# Altium PCB Kanaloa_v2.0.0_Motor.PcbDoc (part 1 of 3)
Units mil, origin at the board's own origin, x right, y up, seen from the top; angles counter-clockwise.
Board outline 5000 x 6000 mil, 4 copper layers (Top Layer, +24V, GND, Bottom Layer), stack 62 mil thick; 213 components, 187 nets, 1008 pads, 744 vias.
Unrouted connection lines stored in the file: 2.
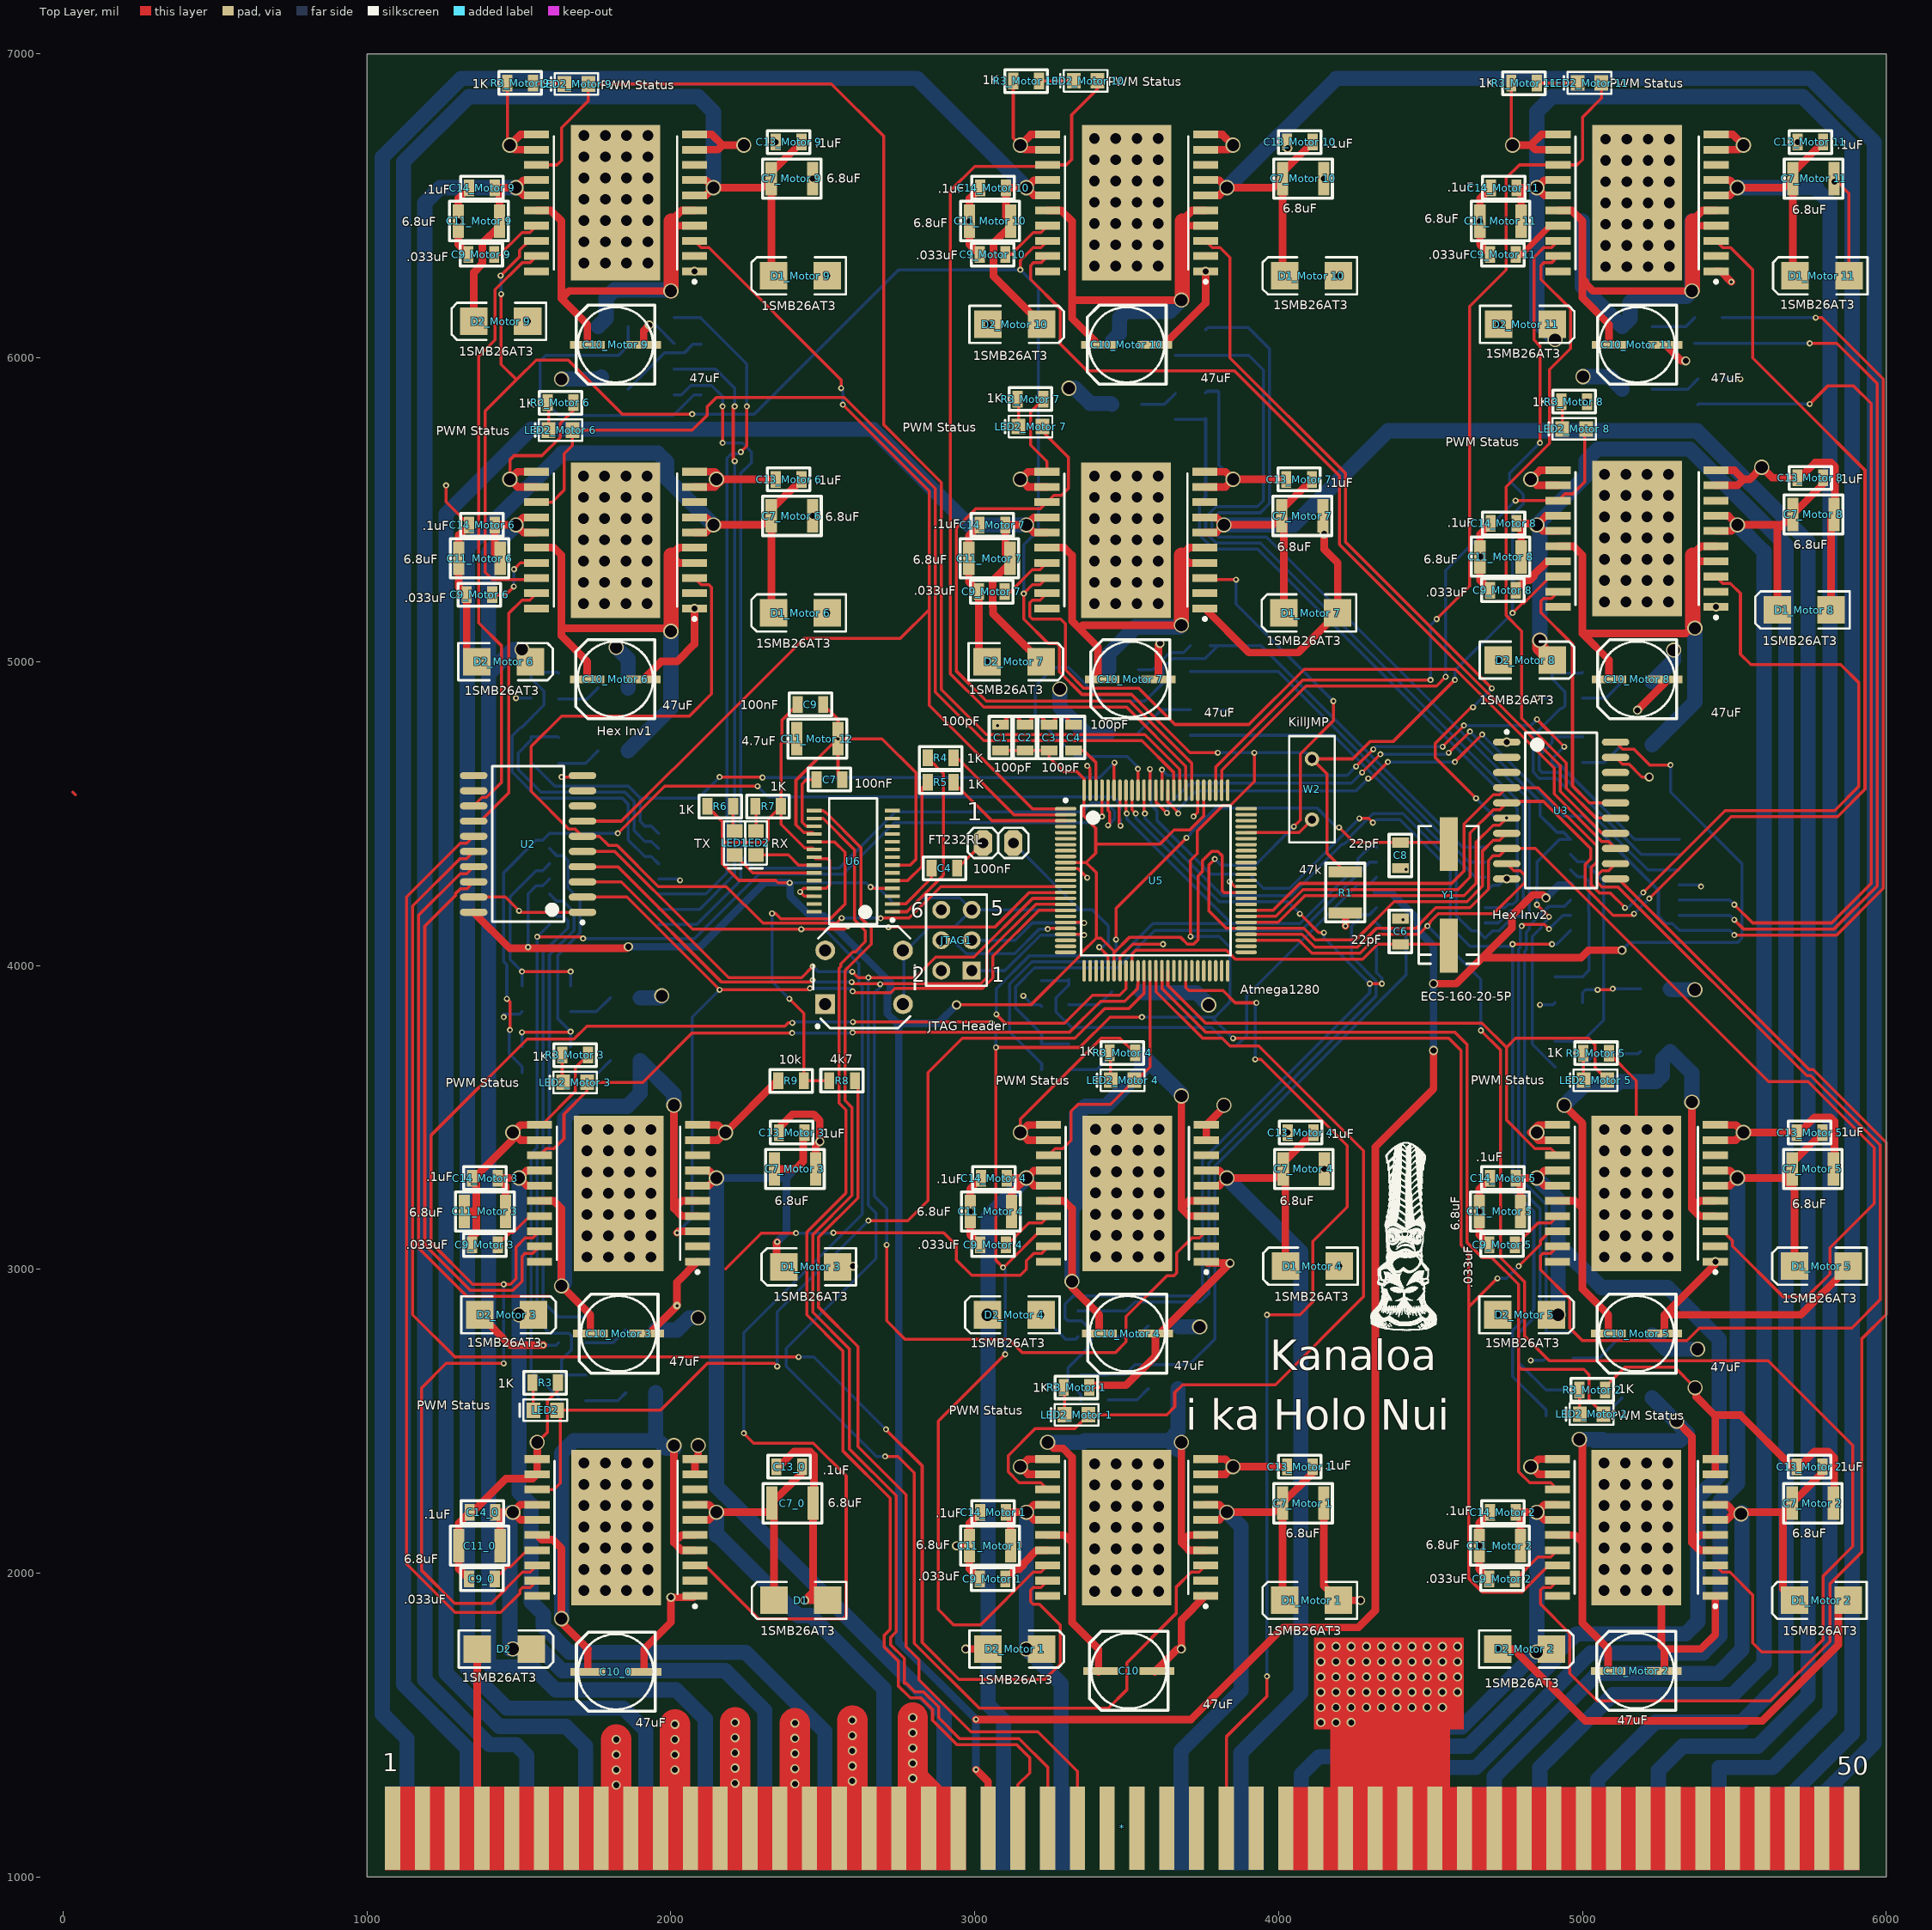
[diagram p0: Top Layer view]
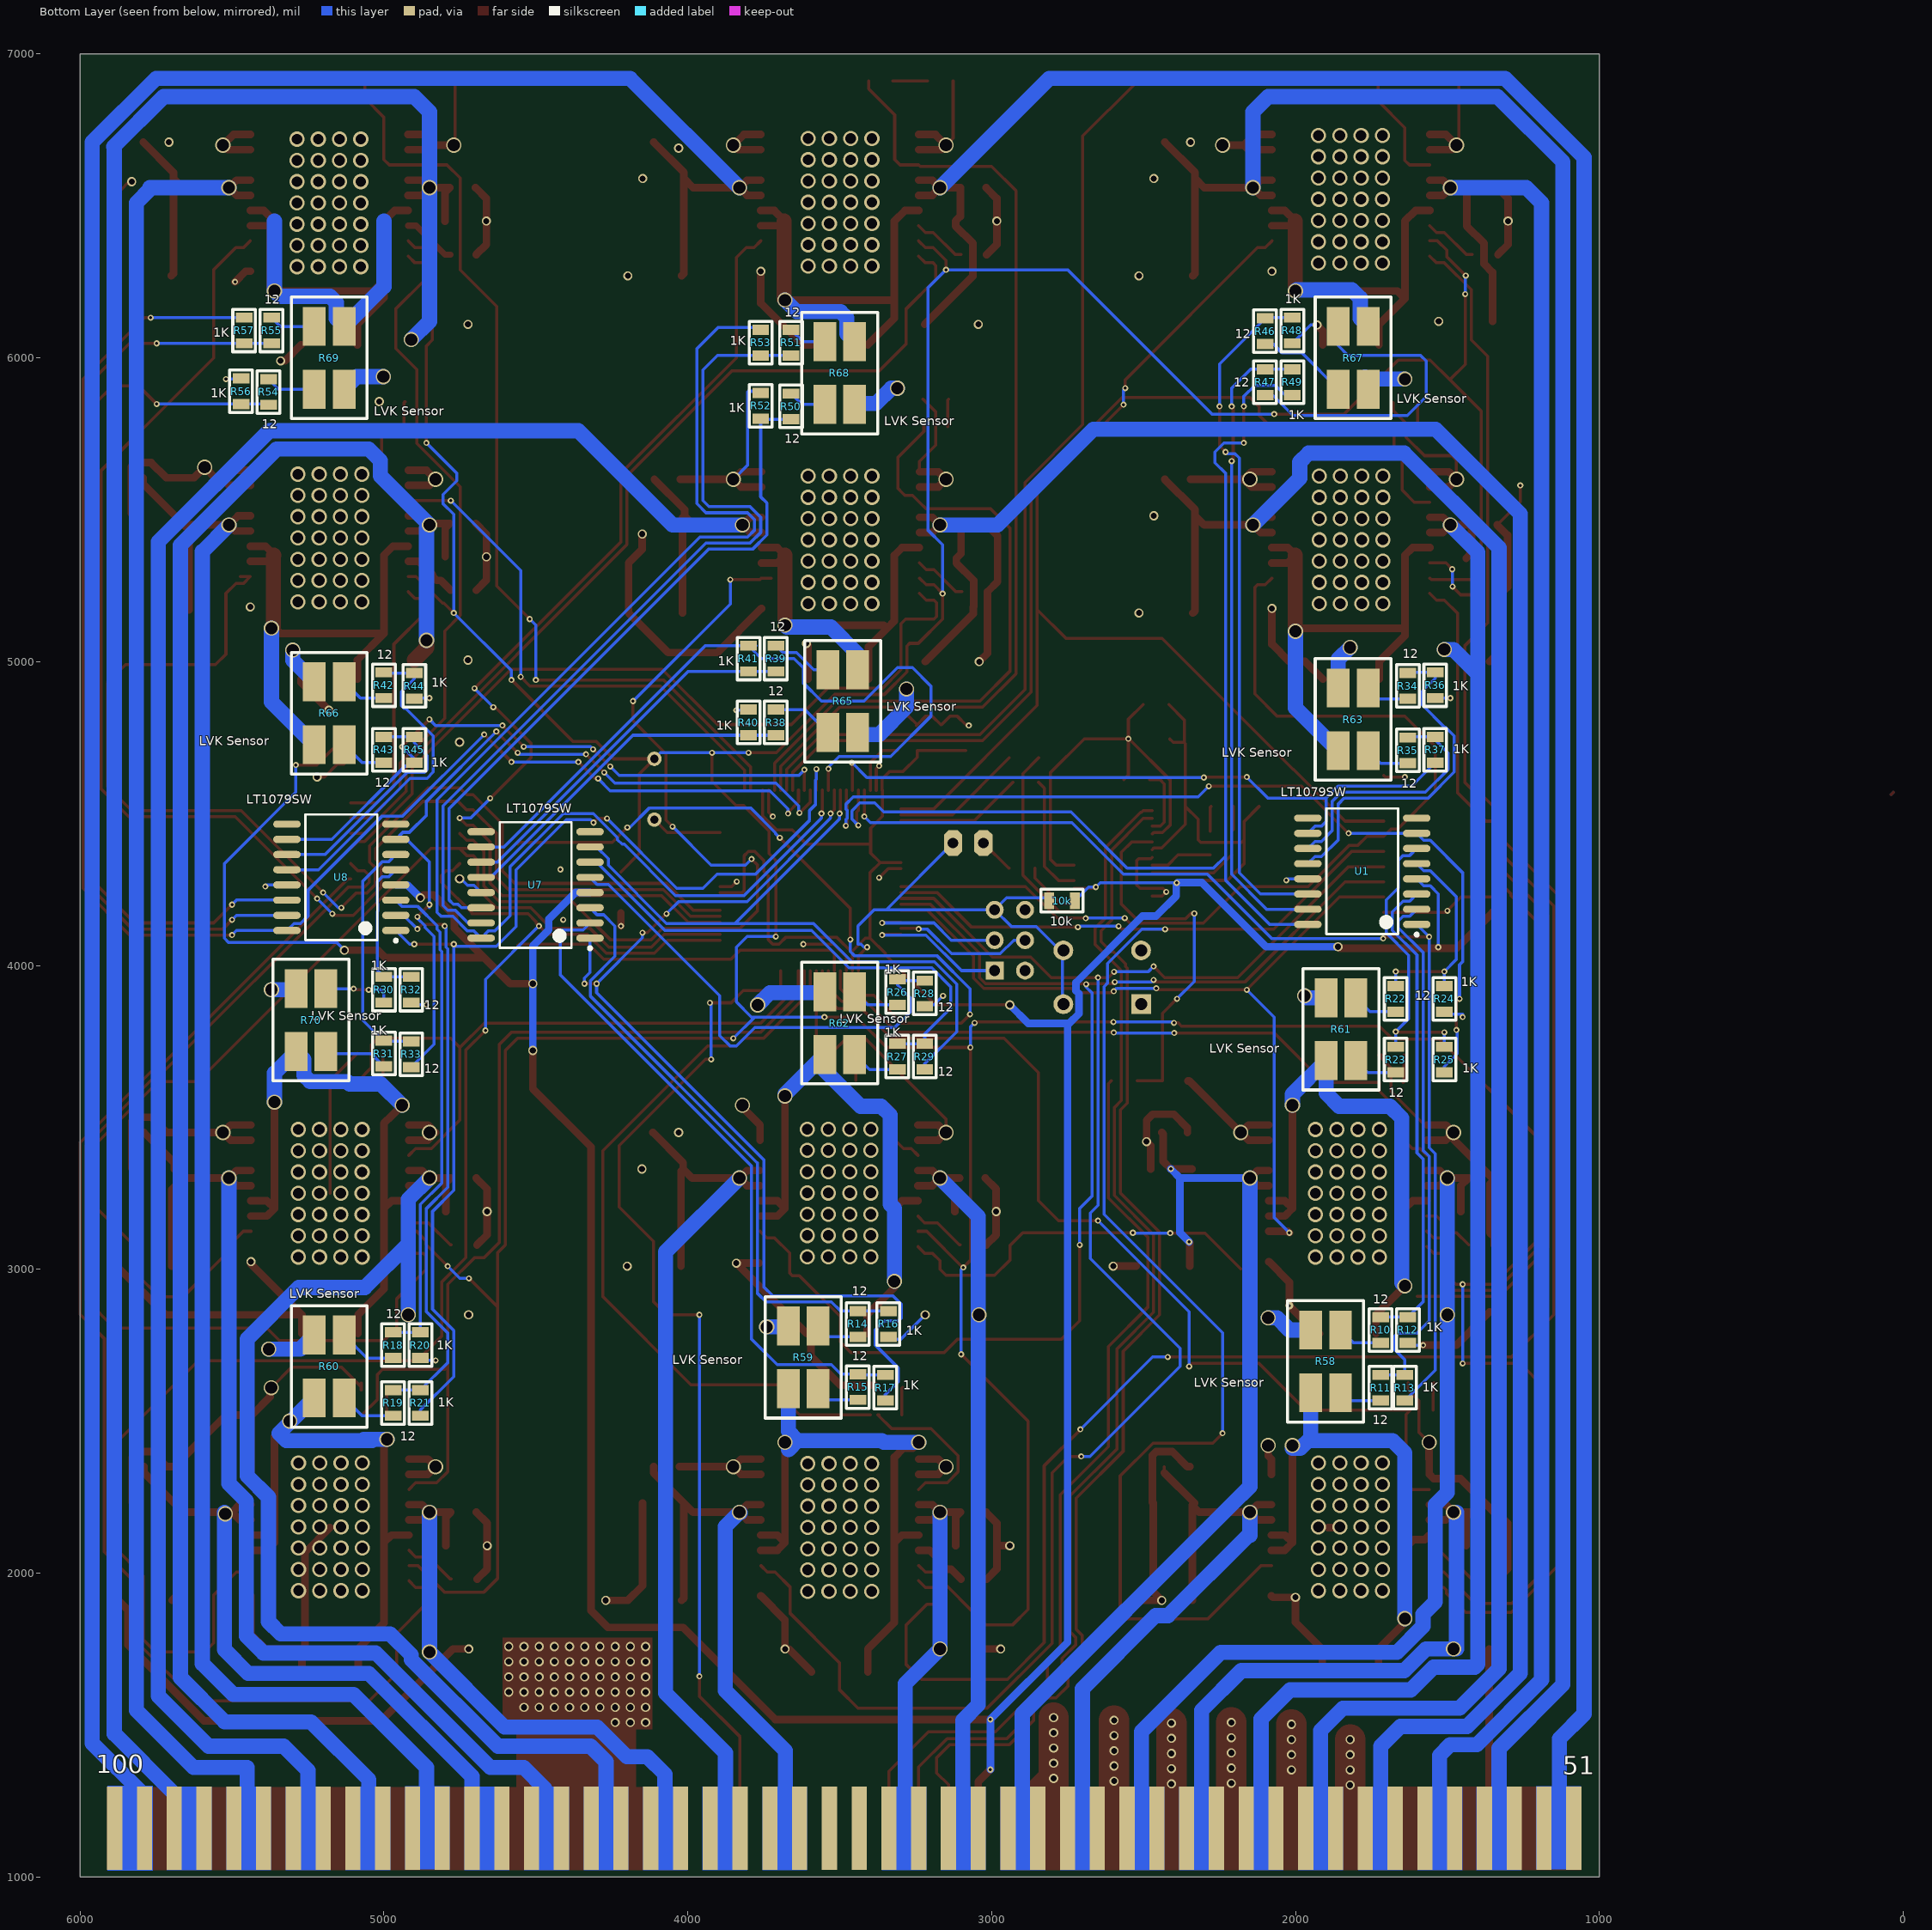
[diagram p1: Bottom Layer view, seen from below]
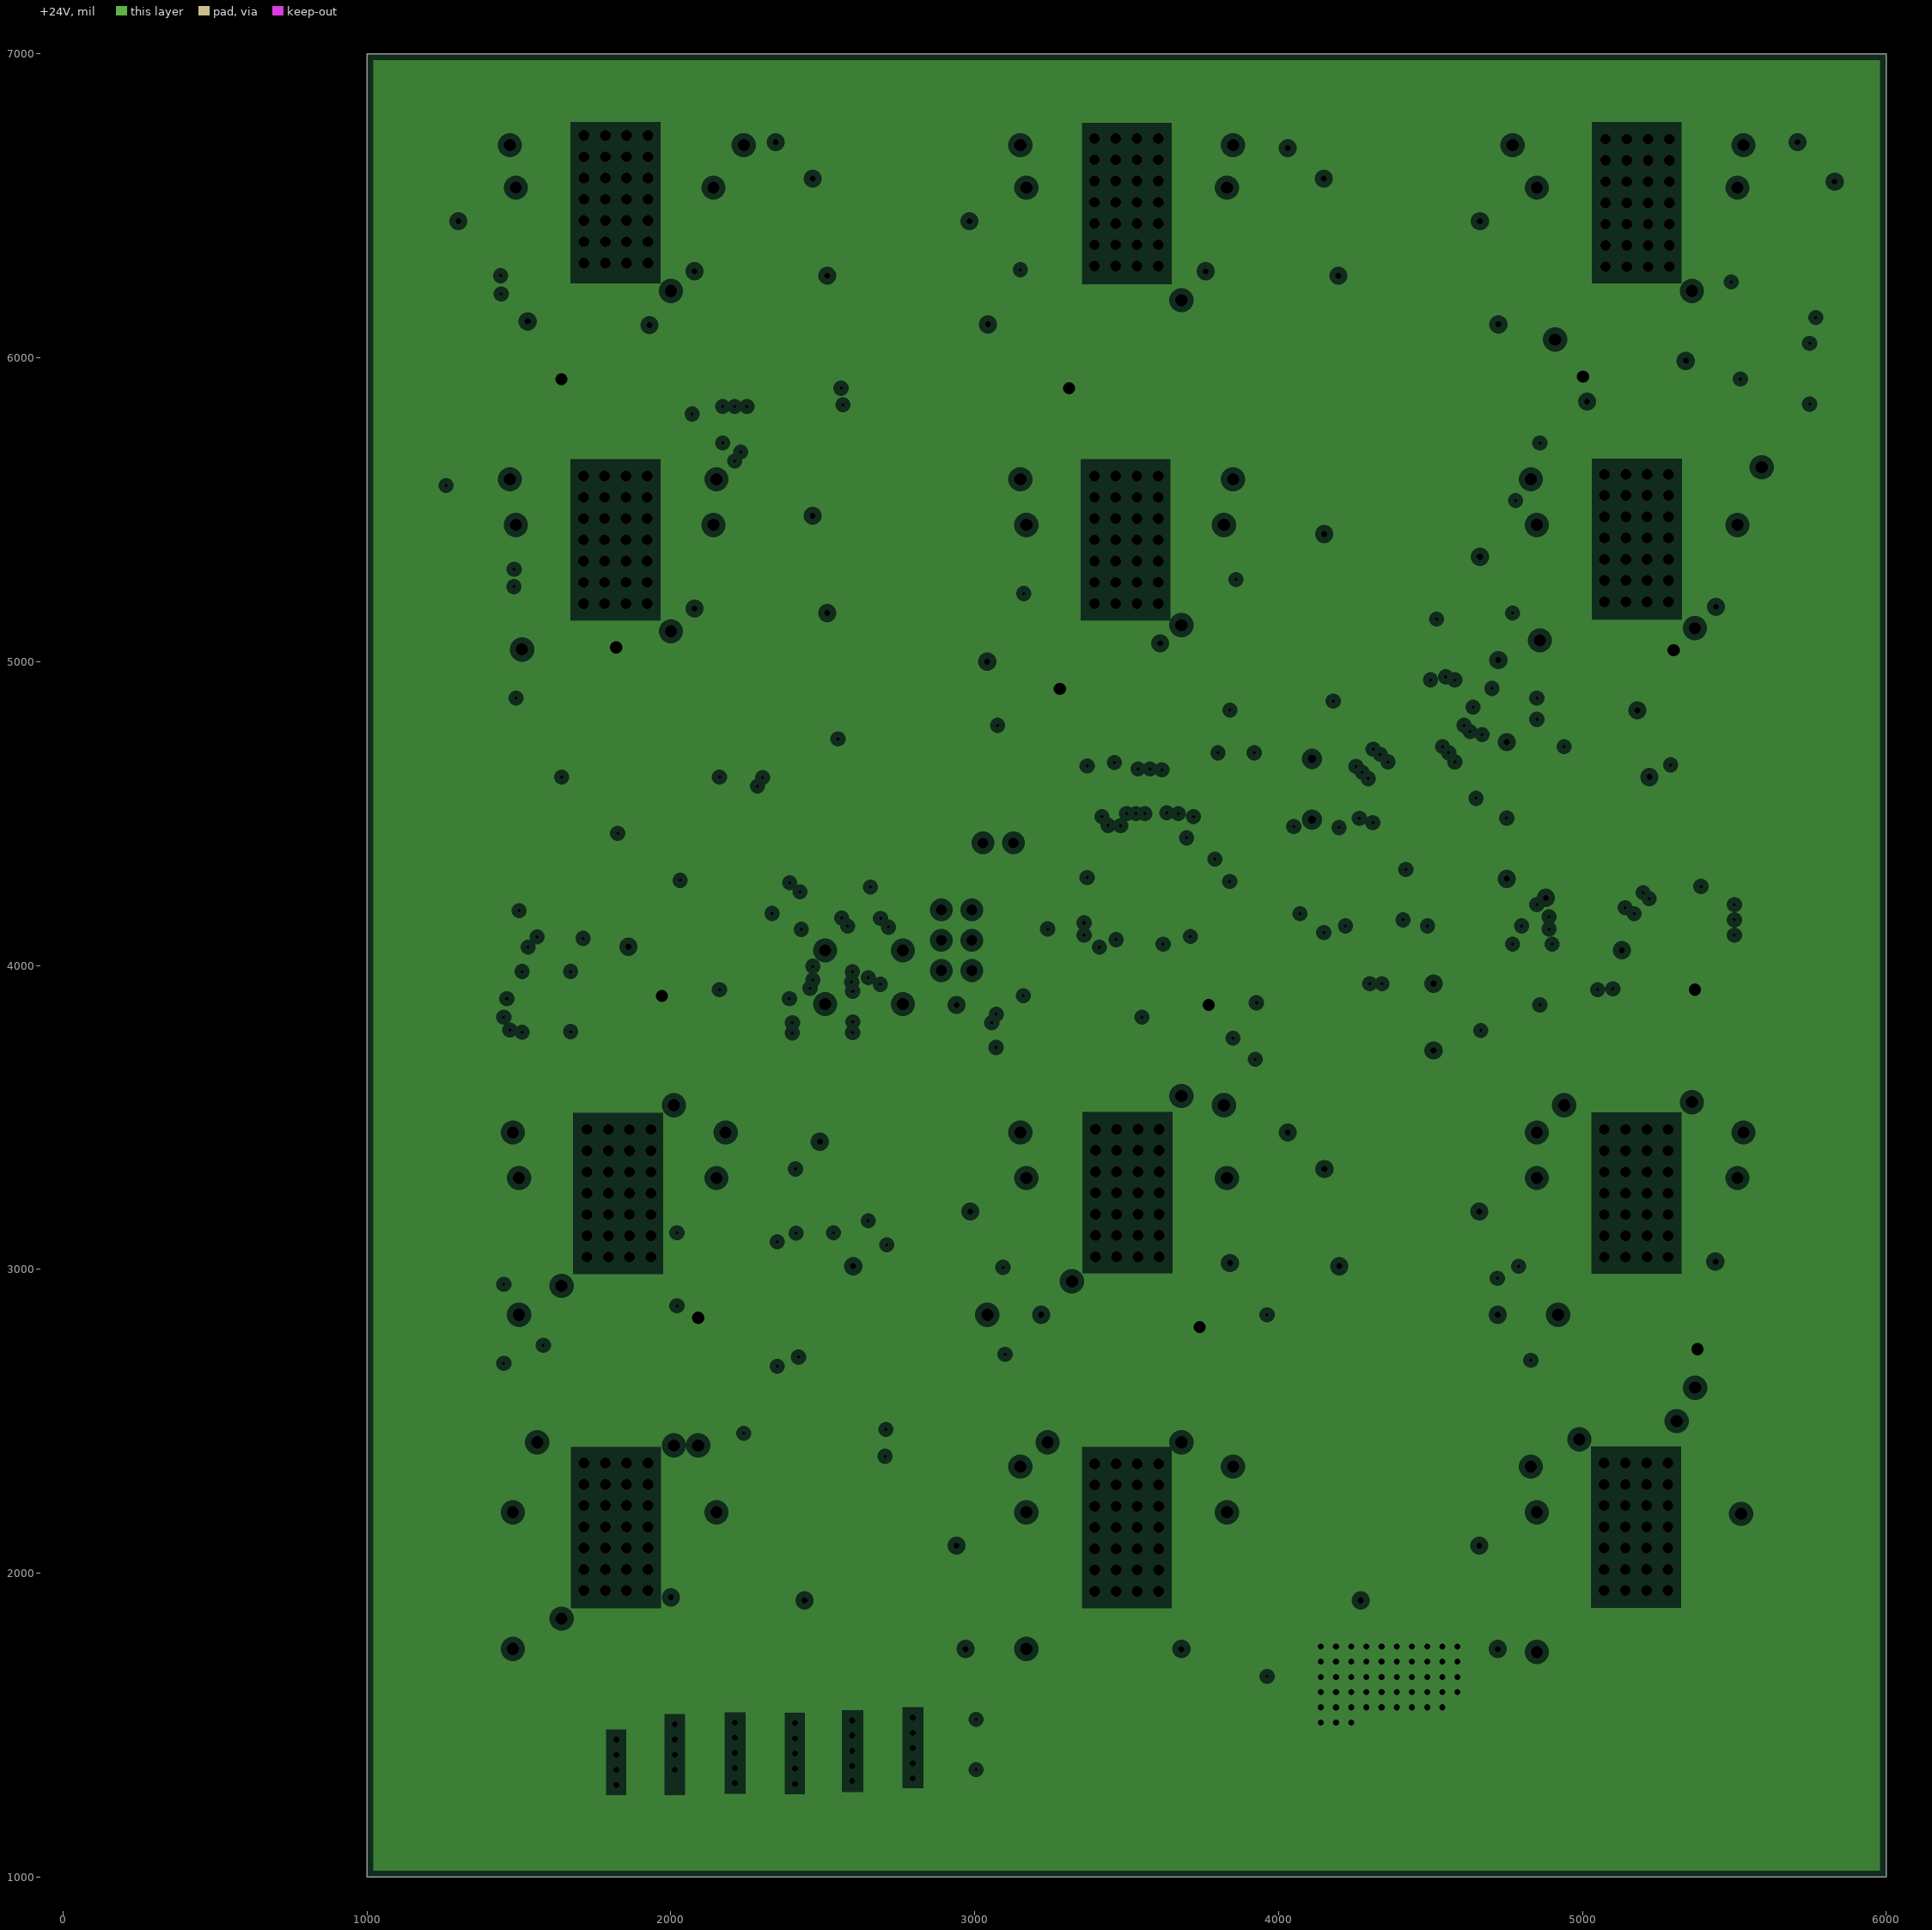
[diagram p2: +24V, clearances drawn from the general rule]
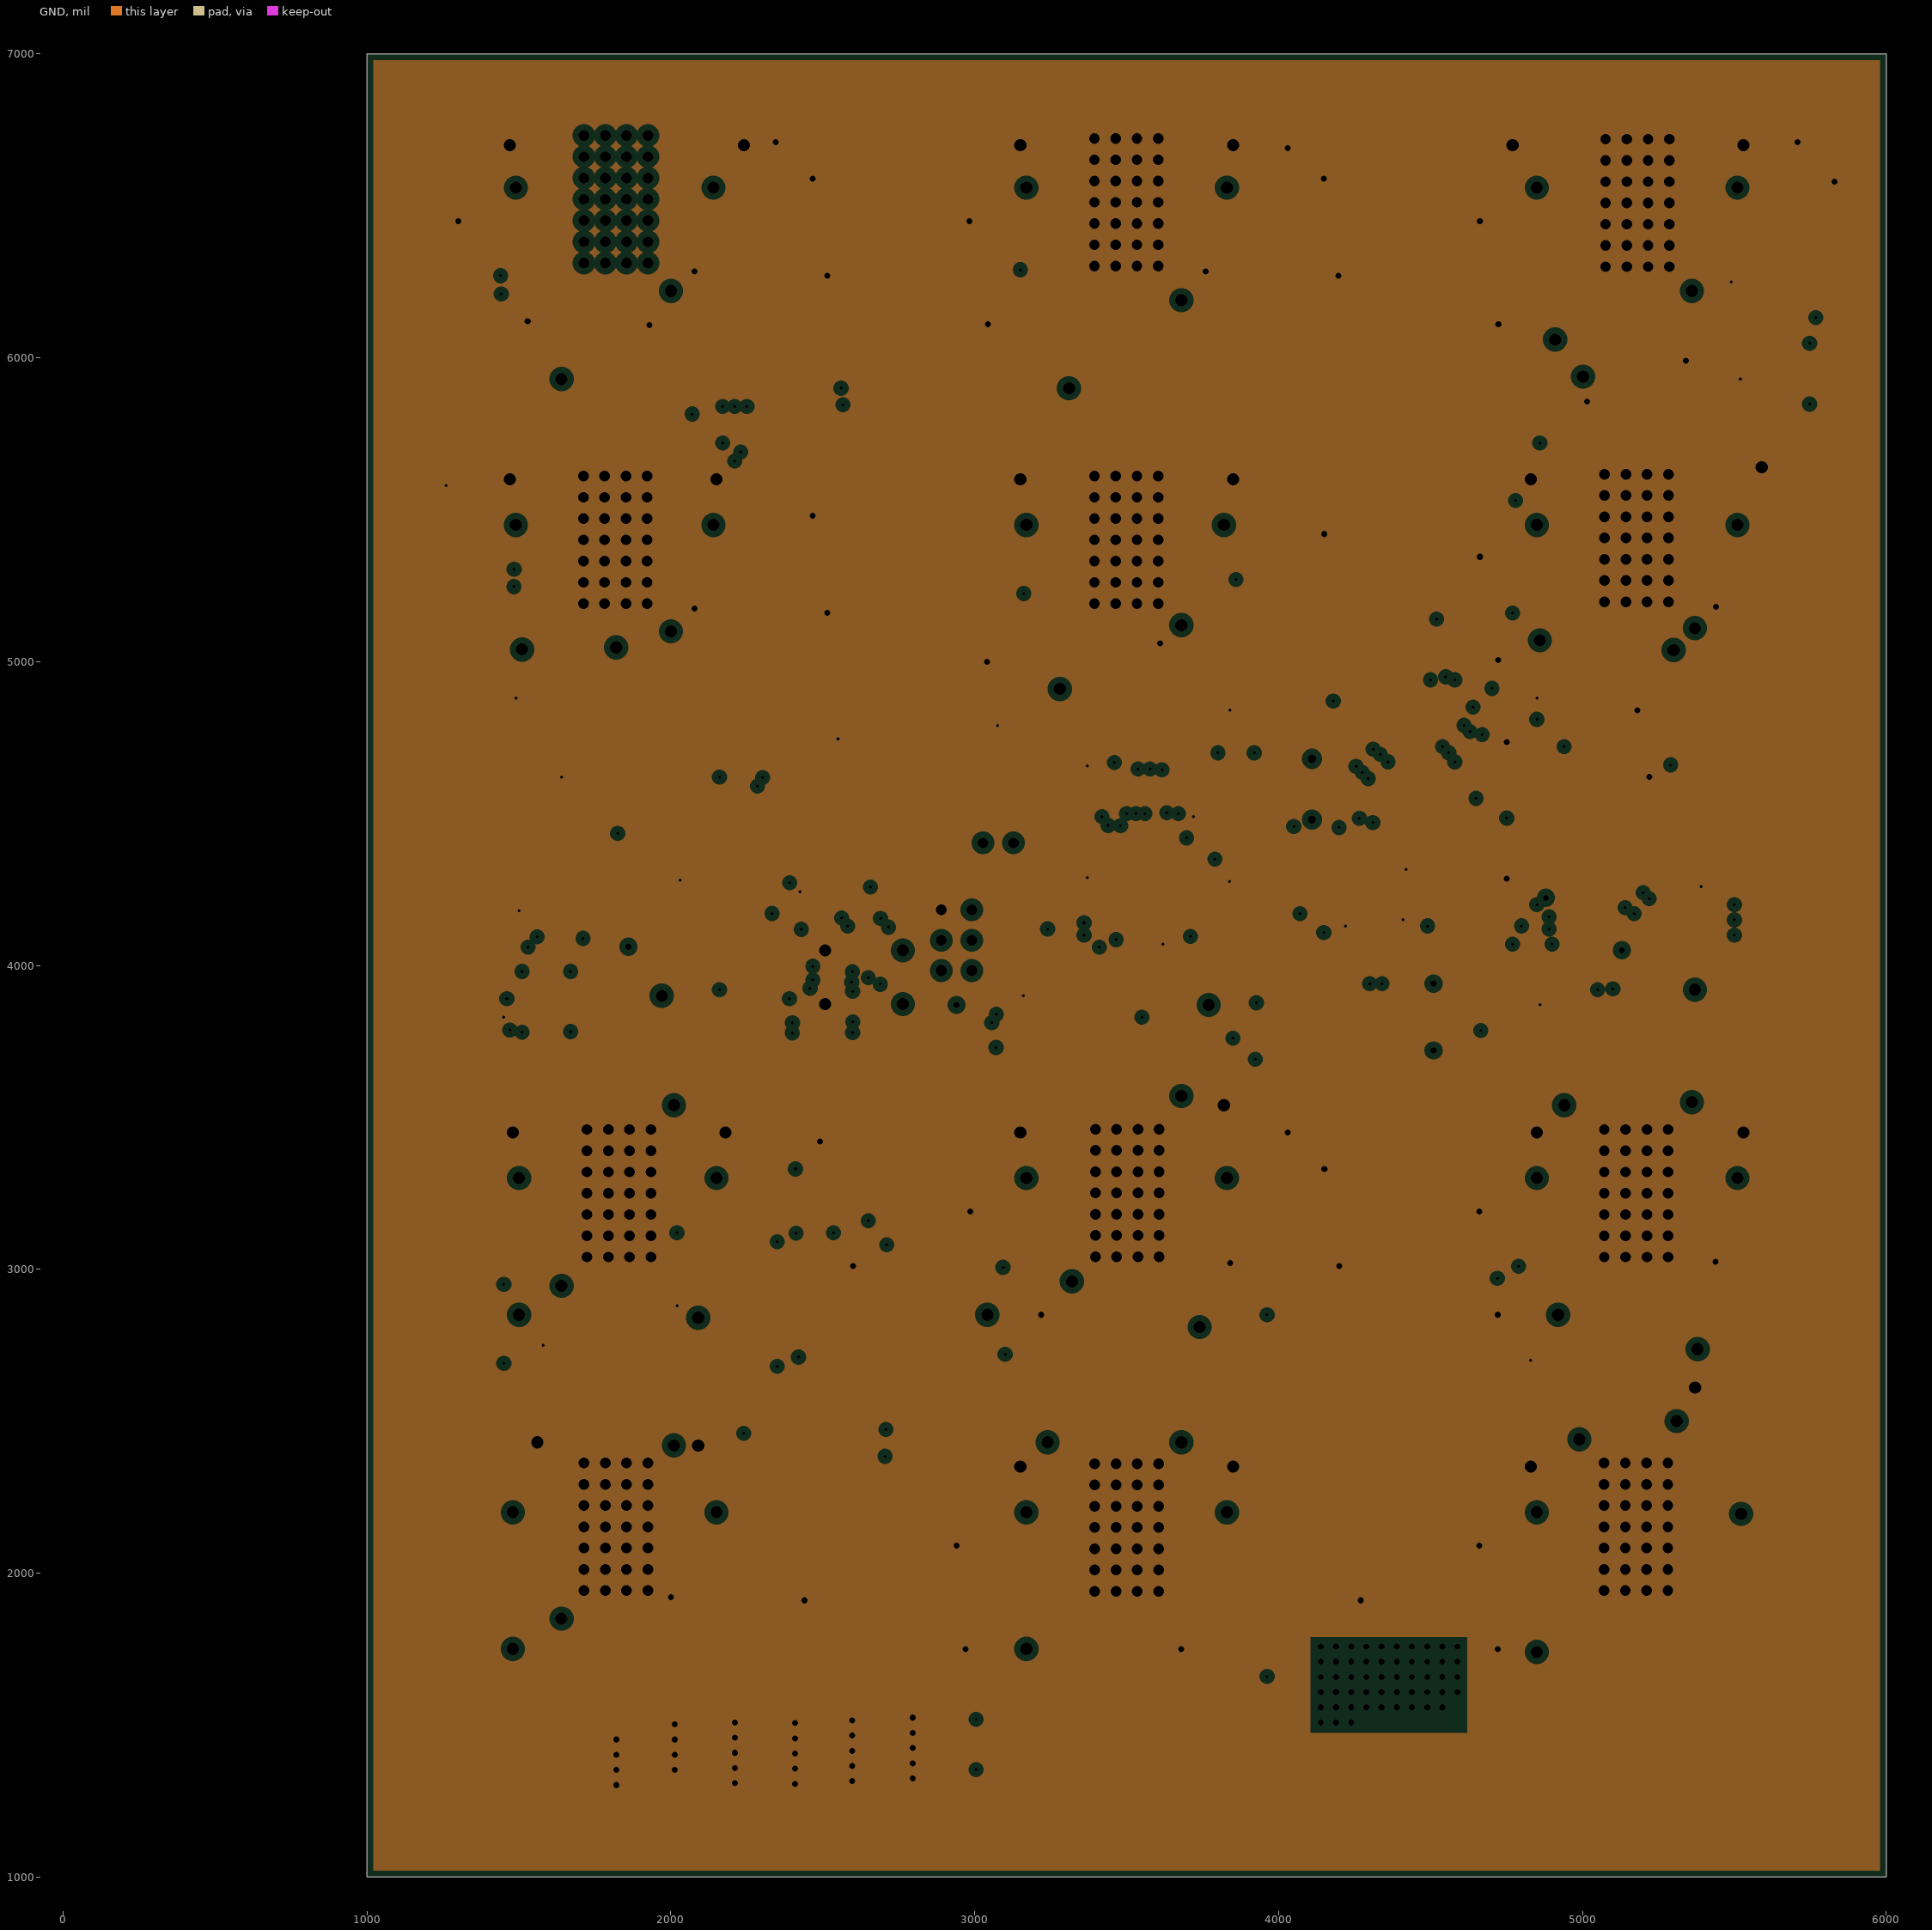
[diagram p3: GND, clearances drawn from the general rule]

## Layer stack, top to bottom
Top Layer: signal copper 1.4
Dielectric: core 8.2, FR-4, Dk 4.8
+24V: plane copper 1.4, net +24VPRE
Dielectric: prepreg 40, FR-4, Dk 4.8
GND: plane copper 1.4, net GND
Dielectric: core 8.2, FR-4, Dk 4.8
Bottom Layer: signal copper 1.4

## Board outline
1000,1000 1000,7000 6000,7000 6000,1000

## Design rules (kind name [scope] priority, off if disabled: settings)
Clearance [All] p1: gap=5
DiffPairsRouting [All] p1: maxlimit=10 minlimit=10 mostfreqgap=10 maxuncoupledlength=500
MinimumAnnularRing MinimumAnnularRingComponent [InComponent('*')] p1: minimumring=7
MinimumAnnularRing MinimumAnnularRingVia [IsVia] p2: minimumring=5
MinimumSolderMaskSliver [All] p1: minsoldermaskwidth=5
PlaneClearance [All] p1: clearance=20
PlaneConnect PlaneConnect_2 [(ObjectKind = 'Via') And (Net = 'GND') And (ViaDiameter = AsMils(30)) And (HoleDiameter = AsMils(20))] p1: planeconnectstyle=Direct reliefexpansion=20 reliefentries=4 reliefconductorwidth=10 reliefairgap=10
PlaneConnect PlaneConnect_1 [(ObjectKind = 'Via') And (Net = '+24VPRE') And (ViaDiameter = AsMils(30)) And (HoleDiameter = AsMils(20))] p2: planeconnectstyle=Direct reliefexpansion=20 reliefentries=4 reliefconductorwidth=10 reliefairgap=10
PlaneConnect PlaneConnect_Array [(ObjectKind = 'Via') And (Net = 'GND') And (ViaDiameter = AsMils(30)) And (HoleDiameter = AsMils(15))] p3: planeconnectstyle=Direct reliefexpansion=20 reliefentries=4 reliefconductorwidth=10 reliefairgap=10
PlaneConnect [All] p4: planeconnectstyle=Relief reliefexpansion=20 reliefentries=4 reliefconductorwidth=10 reliefairgap=10
PolygonConnect [All] p1: connectstyle=Relief reliefconductorwidth=10 reliefentries=4 polygonreliefangle="90 Angle"
RoutingVias [All] p1: holewidth=28 width=50 viastyle="Through Hole" minholewidth=28 minwidth=50 maxholewidth=28 maxwidth=50
SilkToSilkClearance [All] p1: silktosilkclearance=0
SilkscreenOverComponentPads [(InNet('+24VPRE') AND InNet('GND'))] p1: minsilkscreentomaskgap=10
SolderMaskExpansion [All] p1: expansion=4
Width [All] p1: maxlimit=100 minlimit=10 preferedwidth=10
22 further rules are at their usual default settings.

## Classes and differential pairs
channel class "Motor Controllers": "Motor 0" "Motor 1" "Motor 2" "Motor 3" "Motor 4" "Motor 5" "Motor 6" "Motor 7" "Motor 8" "Motor 9" "Motor 10" "Motor 11"
net class PWM[11..0]: PWM0 PWM1 PWM2 PWM3 PWM4 PWM5 PWM6 PWM7 PWM8 PWM9 PWM10 PWM11
net class DIR[11..0]: DIR0 DIR1 DIR2 DIR3 DIR4 DIR5 DIR6 DIR7 DIR8 DIR9 DIR10 DIR11 DIR12
net class CS[11..0]: CS0 CS1 CS2 CS3 CS4 CS5 CS6 CS7 CS8 CS9 CS10 CS11
component class "Motor 11": "C7_Motor 11" "C9_Motor 11" "C10_Motor 11" "C11_Motor 11" "C13_Motor 11" "C14_Motor 11" "D1_Motor 11" "D2_Motor 11" "LED2_Motor 11" "R3_Motor 11"
component class "Motor 10": "C7_Motor 10" "C9_Motor 10" "C11_Motor 10" "C13_Motor 10" "C14_Motor 10" "D1_Motor 10" "D2_Motor 10" "LED2_Motor 10" "R3_Motor 10"
component class "Motor 9": "C7_Motor 9" "C9_Motor 9" "C10_Motor 9" "C11_Motor 9" "C13_Motor 9" "C14_Motor 9" "D1_Motor 9" "D2_Motor 9" "LED2_Motor 9" "R3_Motor 9"
component class "Motor 8": "C7_Motor 8" "C9_Motor 8" "C10_Motor 8" "C11_Motor 8" "C13_Motor 8" "C14_Motor 8" "D1_Motor 8" "D2_Motor 8" "LED2_Motor 8" "R3_Motor 8"
component class "Motor 7": "C7_Motor 7" "C9_Motor 7" "C10_Motor 7" "C11_Motor 7" "C13_Motor 7" "C14_Motor 7" "D1_Motor 7" "D2_Motor 7" "LED2_Motor 7" "R3_Motor 7"
component class "Motor 6": "C7_Motor 6" "C9_Motor 6" "C10_Motor 6" "C11_Motor 6" "C13_Motor 6" "C14_Motor 6" "D1_Motor 6" "D2_Motor 6" "LED2_Motor 6" "R3_Motor 6"
component class "Motor 5": "C7_Motor 5" "C9_Motor 5" "C10_Motor 5" "C11_Motor 5" "C13_Motor 5" "C14_Motor 5" "D1_Motor 5" "D2_Motor 5" "R3_Motor 5"
component class "Motor 4": "C7_Motor 4" "C9_Motor 4" "C10_Motor 4" "C11_Motor 4" "C13_Motor 4" "C14_Motor 4" "D1_Motor 4" "D2_Motor 4" "LED2_Motor 4" "R3_Motor 4"
component class "Motor 3": "C7_Motor 3" "C9_Motor 3" "C10_Motor 3" "C11_Motor 3" "C13_Motor 3" "C14_Motor 3" "D1_Motor 3" "D2_Motor 3" "LED2_Motor 3" "R3_Motor 3"
component class "Motor 2": "C7_Motor 2" "C9_Motor 2" "C10_Motor 2" "C11_Motor 2" "C13_Motor 2" "C14_Motor 2" "D1_Motor 2" "D2_Motor 2" "LED2_Motor 2" "R3_Motor 2"
component class "Motor 1": "C7_Motor 1" "C9_Motor 1" C10_0 "C11_Motor 1" "C13_Motor 1" "C14_Motor 1" "D1_Motor 1" "D2_Motor 1" "LED2_Motor 1" "R3_Motor 1"
component class "Motor 0": C7_0 C9_0 C10_0 C11_0 C13_0 C14_0 D1 D2 LED2 R3
component class Microcontroller: C1 C2 C3 C4 C6 C8 JTAG1 LED1 LED2 R4 R5 R6 R7 U5 U6 USB1 Y1
component class Kanaloa_v2.0.0_Motor: R1 U2 U3 W2
component class "Current Sensors": R10 R11 R12 R13 R14 R15 R16 R17 R18 R19 R20 R21 R22 R23 R24 R25 R26 R27 R28 R29 R30 R31 R32 R33 R34 R35 R36 R37 R38 R39 R40 R41 R42 R43 R44 R45 R46 R47 R48 R49 R50 R51 R52 R53 R54 R55 R56 R57 U8
differential pair USB: +"USB DP" -"USB DM"

## Components (designator, comment, footprint, x,y, rotation, side; value= is the part's Value field where it differs from the comment)
1 "" "Male 2X1" 3027,4403 r0 top
10k "10k" "R 0805 (2012) RESISTOR" 2768.32,4213 r0 bottom
* "EdgeCon" "5645235-3 CON" 1084,1160 r0 top
C1 "100pF" "0805 (2012) Capacitor" 3085,4750 r90 top
C2 "100pF" "0805 (2012) Capacitor" 3165,4750 r90 top
C3 "100pF" "0805 (2012) Capacitor" 3245,4750 r90 top
C4 "100nF" "0805 (2012) Capacitor" 2900,4320 r180 top
C4 "100pF" "0805 (2012) Capacitor" 3325,4750 r90 top
C6 "22pF" "0805 (2012) Capacitor" 4401,4112 r270 top
C7 "100nF" "0805 (2012) Capacitor" 2522,4612 r0 top (schematic designator C4)
C7_0 "6.8uF" "1210 (3225) Capacitor" 2400,2230 r180 top (schematic designator C7)
"C7_Motor 1" "6.8uF" "1210 (3225) Capacitor" 4080.63,2230 r180 top (schematic designator C7)
"C7_Motor 2" "6.8uF" "1210 (3225) Capacitor" 5758.11,2230 r180 top (schematic designator C7)
"C7_Motor 3" "6.8uF" "1210 (3225) Capacitor" 2408.31,3330 r180 top (schematic designator C7)
"C7_Motor 4" "6.8uF" "1210 (3225) Capacitor" 4082.95,3330 r180 top (schematic designator C7)
"C7_Motor 5" "6.8uF" "1210 (3225) Capacitor" 5758.31,3330 r180 top (schematic designator C7)
"C7_Motor 6" "6.8uF" "1210 (3225) Capacitor" 2398.35,5480 r180 top (schematic designator C7)
"C7_Motor 7" "6.8uF" "1210 (3225) Capacitor" 4078.11,5480 r180 top (schematic designator C7)
"C7_Motor 8" "6.8uF" "1210 (3225) Capacitor" 5760.47,5485 r180 top (schematic designator C7)
"C7_Motor 9" "6.8uF" "1210 (3225) Capacitor" 2398.31,6590 r180 top (schematic designator C7)
"C7_Motor 10" "6.8uF" "1210 (3225) Capacitor" 4080.63,6590 r180 top (schematic designator C7)
"C7_Motor 11" "6.8uF" "1210 (3225) Capacitor" 5760.63,6590 r180 top (schematic designator C7)
C8 "22pF" "0805 (2012) Capacitor" 4401,4362.32 r90 top
C9 "100nF" "0805 (2012) Capacitor" 2459,4859 r0 top (schematic designator C4)
C9_0 ".033uF" "0805 (2012) Capacitor" 1377.68,1980 r0 top (schematic designator C9)
"C9_Motor 1" ".033uF" "0805 (2012) Capacitor" 3058.31,1980 r0 top (schematic designator C9)
"C9_Motor 2" ".033uF" "0805 (2012) Capacitor" 4735.79,1980 r0 top (schematic designator C9)
"C9_Motor 3" ".033uF" "0805 (2012) Capacitor" 1387.68,3080 r0 top (schematic designator C9)
"C9_Motor 4" ".033uF" "0805 (2012) Capacitor" 3060.63,3080 r0 top (schematic designator C9)
"C9_Motor 5" ".033uF" "0805 (2012) Capacitor" 4735.98,3080 r0 top (schematic designator C9)
"C9_Motor 6" ".033uF" "0805 (2012) Capacitor" 1370,5220 r0 top (schematic designator C9)
"C9_Motor 7" ".033uF" "0805 (2012) Capacitor" 3055.79,5230 r0 top (schematic designator C9)
"C9_Motor 8" ".033uF" "0805 (2012) Capacitor" 4738.15,5235 r0 top (schematic designator C9)
"C9_Motor 9" ".033uF" "0805 (2012) Capacitor" 1375.98,6340 r0 top (schematic designator C9)
"C9_Motor 10" ".033uF" "0805 (2012) Capacitor" 3058.31,6340 r0 top (schematic designator C9)
"C9_Motor 11" ".033uF" "0805 (2012) Capacitor" 4738.31,6340 r0 top (schematic designator C9)
C10 "47uF" Radial_6.3mmDia_SMD 3507,1678 r180 top
C10_0 "47uF" Radial_6.3mmDia_SMD 1819,1675 r180 top (schematic designator C10)
"C10_Motor 2" "47uF" Radial_6.3mmDia_SMD 5177,1678 r180 top (schematic designator C10)
"C10_Motor 3" "47uF" Radial_6.3mmDia_SMD 1827.68,2788 r180 top (schematic designator C10)
"C10_Motor 4" "47uF" Radial_6.3mmDia_SMD 3502.32,2788 r180 top (schematic designator C10)
"C10_Motor 5" "47uF" Radial_6.3mmDia_SMD 5178,2788 r180 top (schematic designator C10)
"C10_Motor 6" "47uF" Radial_6.3mmDia_SMD 1817,4942 r180 top (schematic designator C10)
"C10_Motor 7" "47uF" Radial_6.3mmDia_SMD 3512,4942 r180 top (schematic designator C10)
"C10_Motor 8" "47uF" Radial_6.3mmDia_SMD 5179.84,4942 r180 top (schematic designator C10)
"C10_Motor 9" "47uF" Radial_6.3mmDia_SMD 1817.68,6043 r180 top (schematic designator C10)
"C10_Motor 10" "47uF" Radial_6.3mmDia_SMD 3500,6043 r180 top (schematic designator C10)
"C10_Motor 11" "47uF" Radial_6.3mmDia_SMD 5180,6043 r180 top (schematic designator C10)
C11_0 "6.8uF" "1210 (3225) Capacitor" 1370,2090 r0 top (schematic designator C11)
"C11_Motor 1" "6.8uF" "1210 (3225) Capacitor" 3050.63,2090 r0 top (schematic designator C11)
"C11_Motor 2" "6.8uF" "1210 (3225) Capacitor" 4728.11,2090 r0 top (schematic designator C11)
"C11_Motor 3" "6.8uF" "1210 (3225) Capacitor" 1387.91,3190 r0 top (schematic designator C11)
"C11_Motor 4" "6.8uF" "1210 (3225) Capacitor" 3052.95,3190 r0 top (schematic designator C11)
"C11_Motor 5" "6.8uF" "1210 (3225) Capacitor" 4728.31,3190 r0 top (schematic designator C11)
"C11_Motor 6" "6.8uF" "1210 (3225) Capacitor" 1370,5340 r0 top (schematic designator C11)
"C11_Motor 7" "6.8uF" "1210 (3225) Capacitor" 3048.11,5340 r0 top (schematic designator C11)
"C11_Motor 8" "6.8uF" "1210 (3225) Capacitor" 4730.47,5345 r0 top (schematic designator C11)
"C11_Motor 9" "6.8uF" "1210 (3225) Capacitor" 1368.31,6450 r0 top (schematic designator C11)
"C11_Motor 10" "6.8uF" "1210 (3225) Capacitor" 3050.63,6450 r0 top (schematic designator C11)
"C11_Motor 11" "6.8uF" "1210 (3225) Capacitor" 4730.63,6450 r0 top (schematic designator C11)
"C11_Motor 12" "4.7uF" "1210 (3225) Capacitor" 2482,4746 r0 top (schematic designator C11)
C13_0 ".1uF" "0805 (2012) Capacitor" 2389.37,2350 r0 top (schematic designator C13)
"C13_Motor 1" ".1uF" "0805 (2012) Capacitor" 4070,2350 r0 top (schematic designator C13)
"C13_Motor 2" ".1uF" "0805 (2012) Capacitor" 5747.48,2350 r0 top (schematic designator C13)
"C13_Motor 3" ".1uF" "0805 (2012) Capacitor" 2397.68,3450 r0 top (schematic designator C13)
"C13_Motor 4" ".1uF" "0805 (2012) Capacitor" 4072.32,3450 r0 top (schematic designator C13)
"C13_Motor 5" ".1uF" "0805 (2012) Capacitor" 5747.68,3450 r0 top (schematic designator C13)
"C13_Motor 6" ".1uF" "0805 (2012) Capacitor" 2387.72,5600 r0 top (schematic designator C13)
"C13_Motor 7" ".1uF" "0805 (2012) Capacitor" 4067.48,5600 r0 top (schematic designator C13)
"C13_Motor 8" ".1uF" "0805 (2012) Capacitor" 5749.84,5605 r0 top (schematic designator C13)
"C13_Motor 9" ".1uF" "0805 (2012) Capacitor" 2387.68,6710 r0 top (schematic designator C13)
"C13_Motor 10" ".1uF" "0805 (2012) Capacitor" 4070,6710 r0 top (schematic designator C13)
"C13_Motor 11" ".1uF" "0805 (2012) Capacitor" 5750,6710 r0 top (schematic designator C13)
C14_0 ".1uF" "0805 (2012) Capacitor" 1380,2200 r0 top (schematic designator C14)
"C14_Motor 1" ".1uF" "0805 (2012) Capacitor" 3060.63,2200 r0 top (schematic designator C14)
"C14_Motor 2" ".1uF" "0805 (2012) Capacitor" 4738.11,2200 r0 top (schematic designator C14)
"C14_Motor 3" ".1uF" "0805 (2012) Capacitor" 1388.31,3300 r0 top (schematic designator C14)
"C14_Motor 4" ".1uF" "0805 (2012) Capacitor" 3062.95,3300 r0 top (schematic designator C14)
"C14_Motor 5" ".1uF" "0805 (2012) Capacitor" 4738.31,3300 r0 top (schematic designator C14)
"C14_Motor 6" ".1uF" "0805 (2012) Capacitor" 1378.35,5450 r0 top (schematic designator C14)
"C14_Motor 7" ".1uF" "0805 (2012) Capacitor" 3058.11,5450 r0 top (schematic designator C14)
"C14_Motor 8" ".1uF" "0805 (2012) Capacitor" 4740.47,5455 r0 top (schematic designator C14)
"C14_Motor 9" ".1uF" "0805 (2012) Capacitor" 1378.31,6560 r0 top (schematic designator C14)
"C14_Motor 10" ".1uF" "0805 (2012) Capacitor" 3060.63,6560 r0 top (schematic designator C14)
"C14_Motor 11" ".1uF" "0805 (2012) Capacitor" 4740.63,6560 r0 top (schematic designator C14)
D1 "1SMB26AT3" 1SMB0AT3G 2427.95,1910 r180 top
"D1_Motor 1" "1SMB26AT3" 1SMB0AT3G 4108.58,1910 r180 top (schematic designator D1)
"D1_Motor 2" "1SMB26AT3" 1SMB0AT3G 5786.06,1910 r180 top (schematic designator D1)
"D1_Motor 3" "1SMB26AT3" 1SMB0AT3G 2460,3008 r180 top (schematic designator D1)
"D1_Motor 4" "1SMB26AT3" 1SMB0AT3G 4110.91,3010 r180 top (schematic designator D1)
"D1_Motor 5" "1SMB26AT3" 1SMB0AT3G 5786.26,3010 r180 top (schematic designator D1)
"D1_Motor 6" "1SMB26AT3" 1SMB0AT3G 2426.3,5160 r180 top (schematic designator D1)
"D1_Motor 7" "1SMB26AT3" 1SMB0AT3G 4106.06,5160 r180 top (schematic designator D1)
"D1_Motor 8" "1SMB26AT3" 1SMB0AT3G 5730,5170 r180 top (schematic designator D1)
"D1_Motor 9" "1SMB26AT3" 1SMB0AT3G 2426.26,6270 r180 top (schematic designator D1)
"D1_Motor 10" "1SMB26AT3" 1SMB0AT3G 4108.58,6270 r180 top (schematic designator D1)
"D1_Motor 11" "1SMB26AT3" 1SMB0AT3G 5788.58,6270 r180 top (schematic designator D1)
D2 "1SMB26AT3" 1SMB0AT3G 1451.42,1750 r0 top
"D2_Motor 1" "1SMB26AT3" 1SMB0AT3G 3132.05,1750 r0 top (schematic designator D2)
"D2_Motor 2" "1SMB26AT3" 1SMB0AT3G 4809.53,1750 r0 top (schematic designator D2)
"D2_Motor 3" "1SMB26AT3" 1SMB0AT3G 1459.72,2850 r0 top (schematic designator D2)
"D2_Motor 4" "1SMB26AT3" 1SMB0AT3G 3130,2850 r180 top (schematic designator D2)
"D2_Motor 5" "1SMB26AT3" 1SMB0AT3G 4809.72,2850 r0 top (schematic designator D2)
"D2_Motor 6" "1SMB26AT3" 1SMB0AT3G 1449.76,5000 r0 top (schematic designator D2)
"D2_Motor 7" "1SMB26AT3" 1SMB0AT3G 3129.53,5000 r0 top (schematic designator D2)
"D2_Motor 8" "1SMB26AT3" 1SMB0AT3G 4811.89,5005 r0 top (schematic designator D2)
"D2_Motor 9" "1SMB26AT3" 1SMB0AT3G 1440,6120 r180 top (schematic designator D2)
"D2_Motor 10" "1SMB26AT3" 1SMB0AT3G 3132.05,6110 r0 top (schematic designator D2)
"D2_Motor 11" "1SMB26AT3" 1SMB0AT3G 4812.05,6110 r0 top (schematic designator D2)
JTAG1 "JTAG Header" HDR2X3 2990,3983.08 r90 top
LED1 "TX" "LED 0805" 2210,4403.08 r90 top
LED2 "RX" "LED 0805" 2280,4403.08 r90 top
LED2 "PWM Status" "LED 0805" 1586.37,2536 r0 top
"LED2_Motor 1" "PWM Status" "LED 0805" 3335,2521 r0 top (schematic designator LED2)
"LED2_Motor 2" "PWM Status" "LED 0805" 5030,2523 r0 top (schematic designator LED2)
"LED2_Motor 3" "PWM Status" "LED 0805" 1684.68,3615 r0 top (schematic designator LED2)
"LED2_Motor 4" "PWM Status" "LED 0805" 3486.32,3622 r0 top (schematic designator LED2)
"LED2_Motor 5" "PWM Status" "LED 0805" 5043,3622 r0 top (schematic designator LED2)
"LED2_Motor 6" "PWM Status" "LED 0805" 1636.72,5762 r0 top (schematic designator LED2)
"LED2_Motor 7" "PWM Status" "LED 0805" 3183.48,5774 r0 top (schematic designator LED2)
"LED2_Motor 8" "PWM Status" "LED 0805" 4972.84,5766 r0 top (schematic designator LED2)
"LED2_Motor 9" "PWM Status" "LED 0805" 1689,6901.53 r0 top (schematic designator LED2)
"LED2_Motor 10" "PWM Status" "LED 0805" 3365,6912 r0 top (schematic designator LED2)
"LED2_Motor 11" "PWM Status" "LED 0805" 5023,6905 r0 top (schematic designator LED2)
R1 "47k" "R 1210 (3225) RESISTOR" 4220,4240 r90 top
R3 "1K" "R 0805 (2012) RESISTOR" 1586.37,2626 r0 top
"R3_Motor 1" "1K" "R 0805 (2012) RESISTOR" 3335,2611 r0 top (schematic designator R3)
"R3_Motor 2" "1K" "R 0805 (2012) RESISTOR" 5032.32,2603 r0 top (schematic designator R3)
"R3_Motor 3" "1K" "R 0805 (2012) RESISTOR" 1684.68,3705 r0 top (schematic designator R3)
"R3_Motor 4" "1K" "R 0805 (2012) RESISTOR" 3486.32,3712 r0 top (schematic designator R3)
"R3_Motor 5" "1K" "R 0805 (2012) RESISTOR" 5045,3711 r0 top (schematic designator R3)
"R3_Motor 6" "1K" "R 0805 (2012) RESISTOR" 1636.72,5852 r0 top (schematic designator R3)
"R3_Motor 7" "1K" "R 0805 (2012) RESISTOR" 3183.48,5864 r0 top (schematic designator R3)
"R3_Motor 8" "1K" "R 0805 (2012) RESISTOR" 4972.84,5856 r0 top (schematic designator R3)
"R3_Motor 9" "1K" "R 0805 (2012) RESISTOR" 1504,6905 r180 top (schematic designator R3)
"R3_Motor 10" "1K" "R 0805 (2012) RESISTOR" 3169,6911 r180 top (schematic designator R3)
"R3_Motor 11" "1K" "R 0805 (2012) RESISTOR" 4808,6904 r180 top (schematic designator R3)
R4 "1K" "R 0805 (2012) RESISTOR" 2887.68,4683.08 r180 top
R5 "1K" "R 0805 (2012) RESISTOR" 2887.68,4603.08 r180 top
R6 "1K" "R 0805 (2012) RESISTOR" 2162.32,4523.08 r180 top
R7 "1K" "R 0805 (2012) RESISTOR" 2320,4523.08 r0 top
R8 "4k7" "R 0805 (2012) RESISTOR" 2563.32,3621.08 r180 top (schematic designator R6)
R9 "10k" "R 0805 (2012) RESISTOR" 2395.32,3620.08 r180 top (schematic designator R6)
R10 "12" "R 0805 (2012) RESISTOR" 1720,2800 r90 bottom
R11 "12" "R 0805 (2012) RESISTOR" 1720,2610 r90 bottom
R12 "1K" "R 0805 (2012) RESISTOR" 1630,2800 r270 bottom
R13 "1K" "R 0805 (2012) RESISTOR" 1640,2610 r270 bottom
R14 "12" "R 0805 (2012) RESISTOR" 3440,2820 r90 bottom
R15 "12" "R 0805 (2012) RESISTOR" 3440,2612.32 r90 bottom
R16 "1K" "R 0805 (2012) RESISTOR" 3340,2820 r270 bottom
R17 "1K" "R 0805 (2012) RESISTOR" 3350,2610 r270 bottom
R18 "12" "R 0805 (2012) RESISTOR" 4970,2750 r90 bottom
R19 "12" "R 0805 (2012) RESISTOR" 4970,2560 r90 bottom
R20 "1K" "R 0805 (2012) RESISTOR" 4880,2750 r270 bottom
R21 "1K" "R 0805 (2012) RESISTOR" 4880,2560 r270 bottom
R22 "12" "R 0805 (2012) RESISTOR" 1670,3890 r90 bottom
R23 "12" "R 0805 (2012) RESISTOR" 1670,3690 r90 bottom
R24 "1K" "R 0805 (2012) RESISTOR" 1510,3890 r270 bottom
R25 "1K" "R 0805 (2012) RESISTOR" 1510,3690 r270 bottom
R26 "12" "R 0805 (2012) RESISTOR" 3310,3912.32 r90 bottom
R27 "12" "R 0805 (2012) RESISTOR" 3310,3700 r90 bottom
R28 "1K" "R 0805 (2012) RESISTOR" 3220,3907.68 r270 bottom
R29 "1K" "R 0805 (2012) RESISTOR" 3220,3700 r270 bottom (schematic designator 29)
R30 "12" "R 0805 (2012) RESISTOR" 5000,3920 r90 bottom
R31 "12" "R 0805 (2012) RESISTOR" 5000,3710 r90 bottom
R32 "1K" "R 0805 (2012) RESISTOR" 4910,3920 r270 bottom
R33 "1K" "R 0805 (2012) RESISTOR" 4910,3707.68 r270 bottom
R34 "12" "R 0805 (2012) RESISTOR" 1630,4920 r90 bottom
R35 "12" "R 0805 (2012) RESISTOR" 1630,4707.68 r90 bottom
R36 "1K" "R 0805 (2012) RESISTOR" 1540,4922.32 r270 bottom
R37 "1K" "R 0805 (2012) RESISTOR" 1540,4710 r270 bottom
R38 "12" "R 0805 (2012) RESISTOR" 3710,4800 r270 bottom
R39 "12" "R 0805 (2012) RESISTOR" 3710,5010 r270 bottom
R40 "1K" "R 0805 (2012) RESISTOR" 3800,4800 r90 bottom
R41 "1K" "R 0805 (2012) RESISTOR" 3800,5010 r90 bottom
R42 "12" "R 0805 (2012) RESISTOR" 5000,4922.32 r90 bottom
R43 "12" "R 0805 (2012) RESISTOR" 5000,4710 r90 bottom
R44 "1K" "R 0805 (2012) RESISTOR" 4900,4920 r270 bottom
R45 "1K" "R 0805 (2012) RESISTOR" 4900,4710 r270 bottom
R46 "12" "R 0805 (2012) RESISTOR" 2100,6087.68 r90 bottom
R47 "12" "R 0805 (2012) RESISTOR" 2100,5920 r90 bottom
R48 "1K" "R 0805 (2012) RESISTOR" 2010,6090 r270 bottom
R49 "1K" "R 0805 (2012) RESISTOR" 2010,5920 r270 bottom
R50 "12" "R 0805 (2012) RESISTOR" 3660,5840 r270 bottom
R51 "12" "R 0805 (2012) RESISTOR" 3660,6050 r270 bottom
R52 "1K" "R 0805 (2012) RESISTOR" 3760,5842.32 r90 bottom
R53 "1K" "R 0805 (2012) RESISTOR" 3760,6050 r90 bottom
R54 "12" "R 0805 (2012) RESISTOR" 5380,5887.68 r270 bottom
R55 "12" "R 0805 (2012) RESISTOR" 5370,6090 r270 bottom
R56 "1K" "R 0805 (2012) RESISTOR" 5470,5890 r90 bottom
R57 "1K" "R 0805 (2012) RESISTOR" 5460,6090 r90 bottom
R58 "LVK Sensor" LVK24 1900.79,2696.65 r270 bottom
R59 "LVK Sensor" LVK24 3620,2710 r270 bottom
R60 "LVK Sensor" LVK24 5180,2680 r270 bottom
R61 "LVK Sensor" LVK24 1850,3790 r270 bottom
R62 "LVK Sensor" LVK24 3500,3810 r270 bottom
R63 "LVK Sensor" LVK24 1810,4810 r270 bottom
R65 "LVK Sensor" LVK24 3490,4870 r90 bottom
R66 "LVK Sensor" LVK24 5180,4830 r270 bottom
R67 "LVK Sensor" LVK24 1810,6000 r90 bottom
R68 "LVK Sensor" LVK24 3500,5950 r90 bottom
R69 "LVK Sensor" LVK24 5180,6000 r90 bottom
R70 "LVK Sensor" LVK24 5240,3820 r270 bottom
U1 "LT1079SW" SW16_N 1780,4310 r0 bottom
U2 "Hex Inv1" SN74HTC 1530,4400 r180 top
U3 "Hex Inv2" SN74HTC 4930,4510 r0 top
U5 "Atmega1280" Atmega1280 3596.22,4279.57 r0 top
U6 "FT232RL" "FTDI 232 RL" 2600,4343.08 r180 top
U7 "LT1079SW" SW16_N 4500.87,4265 r0 bottom
U8 "LT1079SW" SW16_N 5140,4290 r0 bottom
W2 "KillJMP" RAD-0.2 4110,4580 r90 top
Y1 "ECS-160-20-5P" CSM-7 4560,4232.32 r90 top
? "" B3F-1000 2636,3961 r0 top

## Footprints (in the part's own frame and the unit in brackets; to place one, negate y for a bottom-side part, rotate by r counter-clockwise, add the part's x,y. Pads: shape width x height; smd on the part's side, far side on the other; paste and mask are expansions set on the pad)
1SMB0AT3G [mm] "DO-214-AA/SMB; 2 C-Bend Leads; Body 5.3 x 3.6 mm, inc. leads (LxW)"
  rect 2.3x2.3 smd: 1(-2.25,0) 2(2.25,0)
  silkscreen extent -3.8,-1.55 4.1,1.55, body extent -2.75,-1.77 2.65,1.83, height 2.27
"0805 (2012) Capacitor" [mm] "0805 (2012) Capacitor"
  rect 0.85x1.4 smd: 1(-1.075,0) 2(1.075,0)
  silkscreen extent -1.78,-0.95 1.78,0.95, body extent -1.19,-0.65 1.19,0.65, height 0.85
"1210 (3225) Capacitor" [mm] "1210 (3225) Capacitor"
  rect 0.95x2.8 smd: 1(-1.725,0) 2(1.725,0)
  silkscreen extent -2.45,-1.63 2.45,1.65, body extent -1.83,-1.43 1.83,1.43, height 1.81
"5645235-3 CON" [mil]
  rect 50x275 smd: 0(0,0) 1(98,0) 2(196,0) 3(294,0) 4(392,0) 5(490,0) 6(588,0) 7(686,0) 8(784,0) 9(882,0) 10(980,0) 11(1078,0) 12(1176,0) 13(1274,0) 14(1372,0) 15(1470,0) 16(1568,0) 17(1666,0) 18(1764,0) 19(1862,0) 20(1960,0) 21(2058,0) 22(2156,0) 23(2254,0) 24(2352,0) 25(2450,0) 26(2548,0) 27(2646,0) 28(2744,0) 29(2842,0) 30(2940,0) 31(3038,0) 32(3136,0) 33(3234,0) 34(3332,0) 35(3430,0) 36(3528,0) 37(3626,0) 38(3724,0) 39(3822,0) 40(3920,0) 41(4018,0) 42(4116,0) 43(4214,0) 44(4312,0) 45(4410,0) 46(4508,0) 47(4606,0) 48(4704,0) 49(4802,0)
  rect 50x275 smd far side: 50(0,0) 51(98,0) 52(196,0) 53(294,0) 54(392,0) 55(490,0) 56(588,0) 57(686,0) 58(784,0) 59(882,0) 60(980,0) 61(1078,0) 62(1176,0) 63(1274,0) 64(1372,0) 65(1470,0) 66(1568,0) 67(1666,0) 68(1764,0) 69(1862,0) 70(1960,0) 71(2058,0) 72(2156,0) 73(2254,0) 74(2352,0) 75(2450,0) 76(2548,0) 77(2646,0) 78(2744,0) 79(2842,0) 80(2940,0) 81(3038,0) 82(3136,0) 83(3234,0) 84(3332,0) 85(3430,0) 86(3528,0) 87(3626,0) 88(3724,0) 89(3822,0) 90(3920,0) 91(4018,0) 92(4116,0) 93(4214,0) 94(4312,0) 95(4410,0) 96(4508,0) 97(4606,0) 98(4704,0) 99(4802,0)
Atmega1280 [mm] "TSQFP, 100-Leads, Body 14x14mm (max), Pitch 0.50mm, IPC Medium Density"
  oval 1.8x0.3 smd: 1(-7.55,6) 2(-7.55,5.5) 3(-7.55,5) 4(-7.55,4.5) 5(-7.55,4) 6(-7.55,3.5) 7(-7.55,3) 8(-7.55,2.5) 9(-7.55,2) 10(-7.55,1.5) 11(-7.55,1) 12(-7.55,0.5) 13(-7.55,0) 14(-7.55,-0.5) 15(-7.55,-1) 16(-7.55,-1.5) 17(-7.55,-2) 18(-7.55,-2.5) 19(-7.55,-3) 20(-7.55,-3.5) 21(-7.55,-4) 22(-7.55,-4.5) 23(-7.55,-5) 24(-7.55,-5.5) 25(-7.55,-6) 51(7.55,-6) 52(7.55,-5.5) 53(7.55,-5) 54(7.55,-4.5) 55(7.55,-4) 56(7.55,-3.5) 57(7.55,-3) 58(7.55,-2.5) 59(7.55,-2) 60(7.55,-1.5) 61(7.55,-1) 62(7.55,-0.5) 63(7.55,0) 64(7.55,0.5) 65(7.55,1) 66(7.55,1.5) 67(7.55,2) 68(7.55,2.5) 69(7.55,3) 70(7.55,3.5) 71(7.55,4) 72(7.55,4.5) 73(7.55,5) 74(7.55,5.5) 75(7.55,6)
  oval 0.3x1.8 smd: 26(-6,-7.55) 27(-5.5,-7.55) 28(-5,-7.55) 29(-4.5,-7.55) 30(-4,-7.55) 31(-3.5,-7.55) 32(-3,-7.55) 33(-2.5,-7.55) 34(-2,-7.55) 35(-1.5,-7.55) 36(-1,-7.55) 37(-0.5,-7.55) 38(0,-7.55) 39(0.5,-7.55) 40(1,-7.55) 41(1.5,-7.55) 42(2,-7.55) 43(2.5,-7.55) 44(3,-7.55) 45(3.5,-7.55) 46(4,-7.55) 47(4.5,-7.55) 48(5,-7.55) 49(5.5,-7.55) 50(6,-7.55) 76(6,7.55) 77(5.5,7.55) 78(5,7.55) 79(4.5,7.55) 80(4,7.55) 81(3.5,7.55) 82(3,7.55) 83(2.5,7.55) 84(2,7.55) 85(1.5,7.55) 86(1,7.55) 87(0.5,7.55) 88(0,7.55) 89(-0.5,7.55) 90(-1,7.55) 91(-1.5,7.55) 92(-2,7.55) 93(-2.5,7.55) 94(-3,7.55) 95(-3.5,7.55) 96(-4,7.55) 97(-4.5,7.55) 98(-5,7.55) 99(-5.5,7.55) 100(-6,7.55)
  silkscreen extent -7.67,-6.25 6.25,6.82, body extent -8,-8 8,8, height 1.03
B3F-1000 [mm] "OMRON Electronics Pushbutton Tactile SPST-NO 0.05A 24V"
  rect 1.65x1.65 hole 1: 1(-3.25,-2.25)
  round 1.65 hole 1: 2(3.25,-2.25) 3(-3.25,2.25) 4(3.25,2.25)
  silkscreen extent -4.25,-4.25 4.25,4.25, body extent -3.81,-3 3.89,3, height 4.3
CSM-7 [mm] "Quartz Crystal, SM; 2 Leads; Body 11.4 x 4.8 x 5 mm (LxWxH)"
  rect 4.5x1.5 smd: 1(-4.25,0) 2(4.25,0)
  silkscreen extent -5.75,-2.5 5.75,2.5
"FTDI 232 RL" [mm] "SOP, 28-Leads, Body 10.5x5.6mm (max), Pitch 0.65mm, IPC Medium Density"
  rect 1.25x0.3 smd: 1(-3.275,4.225) 2(-3.275,3.575) 3(-3.275,2.925) 4(-3.275,2.275) 5(-3.275,1.625) 6(-3.275,0.975) 7(-3.275,0.325) 8(-3.275,-0.325) 9(-3.275,-0.975) 10(-3.275,-1.625) 11(-3.275,-2.275) 12(-3.275,-2.925) 13(-3.275,-3.575) 14(-3.275,-4.225) 15(3.275,-4.225) 16(3.275,-3.575) 17(3.275,-2.925) 18(3.275,-2.275) 19(3.275,-1.625) 20(3.275,-0.975) 21(3.275,-0.325) 22(3.275,0.325) 23(3.275,0.975) 24(3.275,1.625) 25(3.275,2.275) 26(3.275,2.925) 27(3.275,3.575) 28(3.275,4.225)
  silkscreen extent -3.4,-5.25 2,5.25, body extent -3.93,-5.09 3.88,5.11, height 1.98
HDR2X3 [mm] "Connector; Header; 3x2 Position"
  rect 1.5x1.5 hole 0.9: 1(0,0)
  round 1.5 hole 0.9: 2(0,2.54) 3(2.54,0) 4(2.54,2.54) 5(5.08,0) 6(5.08,2.54)
  silkscreen extent -1.27,-1.27 6.35,3.81
"LED 0805" [mm]
  rect 1.15x1.3 smd: 1(-1,0) 2(1,0)
  silkscreen extent -2.12,-0.9 1.83,0.9, body extent -1,-0.63 1,0.62, height 0.8
LVK24 [mm] "Current Sense Resistor Ohmite"
  rect 3.25x1.9 smd: 0(-2.625,1.25) 1(-2.625,-1.25) 2(2.625,1.25) 3(2.625,-1.25)
  silkscreen extent -5.08,-3.18 5.08,3.18, body extent -3.17,-1.68 3.23,1.52, height 0.6
"Male 2X1" [mil]
  oct 60x85 hole 35: 1(0,0) 2(100,0)
  silkscreen extent -50,-50 150,50, body extent -50,-50 150,50, height 460
"R 0805 (2012) RESISTOR" [mm] "0805 (2012) Resistor"
  rect 0.85x1.4 smd: 1(-1.075,0) 2(1.075,0)
  silkscreen extent -1.78,-0.95 1.78,0.95, body extent -1.19,-0.65 1.19,0.65, height 0.85
"R 1210 (3225) RESISTOR" [mm] "1210 (3225) Resistor"
  rect 0.95x2.8 smd: 1(-1.725,0) 2(1.725,0)
  silkscreen extent -2.45,-1.63 2.45,1.65, body extent -1.83,-1.43 1.83,1.43, height 1.81
RAD-0.2 [mm] "Radial Cap, Thru-Hole; 2 Leads; 0.2 in Pin Spacing"
  round 1.2 hole 0.7: 1(-2.54,0) 2(2.54,0)
  silkscreen extent -4.44,-1.91 4.44,1.91
Radial_6.3mmDia_SMD [mm] "Surface Mount Aluminum Electrolytic Capacitor"
  rect 2.9x0.65 smd: N(-2.35,0) P(2.35,0)
  silkscreen extent -3.3,-3.3 3.3,3.3, body extent -3.45,-3.3 3.55,3.3, height 7.7
SN74HTC [mm] "HEX INV TI"
  oval 2.3x0.6 smd: 1(-4.55,5.715) 2(-4.55,4.445) 3(-4.55,3.175) 4(-4.55,1.905) 5(-4.55,0.635) 6(-4.55,-0.635) 7(-4.55,-1.905) 8(-4.55,-3.175) 9(-4.55,-4.445) 10(-4.55,-5.715) 11(4.55,-5.715) 12(4.55,-4.445) 13(4.55,-3.175) 14(4.55,-1.905) 15(4.55,-0.635) 16(4.55,0.635) 17(4.55,1.905) 18(4.55,3.175) 19(4.55,4.445) 20(4.55,5.715)
  silkscreen extent -4.67,-6.5 3,6.69, body extent -5.18,-6.3 5.22,6.3, height 2.6
SW16_N [mm] "SOIC, 16-Leads, Body 10.3x7.5mm, Pitch 1.27mm, IPC Medium Density"
  oval 2.3x0.6 smd: 1(-4.55,4.445) 2(-4.55,3.175) 3(-4.55,1.905) 4(-4.55,0.635) 5(-4.55,-0.635) 6(-4.55,-1.905) 7(-4.55,-3.175) 8(-4.55,-4.445) 9(4.55,-4.445) 10(4.55,-3.175) 11(4.55,-1.905) 12(4.55,-0.635) 13(4.55,0.635) 14(4.55,1.905) 15(4.55,3.175) 16(4.55,4.445)
  silkscreen extent -4.67,-5.25 3,5.42, body extent -3.75,-5.25 3.75,5.25, height 2.65

## Part data
C1 C2 C3 C4 C6 C8: library part Cap, "Capacitor"
C4 C7 C7_0 "C7_Motor 1" "C7_Motor 2" "C7_Motor 3" "C7_Motor 4" "C7_Motor 5" "C7_Motor 6" "C7_Motor 7" "C7_Motor 8" "C7_Motor 9" "C7_Motor 10" "C7_Motor 11" C9 C9_0 "C9_Motor 1" "C9_Motor 2" "C9_Motor 3" "C9_Motor 4" "C9_Motor 5" "C9_Motor 6" "C9_Motor 7" "C9_Motor 8" "C9_Motor 9" "C9_Motor 10" "C9_Motor 11" C11_0 "C11_Motor 1" "C11_Motor 2" "C11_Motor 3" "C11_Motor 4" "C11_Motor 5" "C11_Motor 6" "C11_Motor 7" "C11_Motor 8" "C11_Motor 9" "C11_Motor 10" "C11_Motor 11" "C11_Motor 12" C13_0 "C13_Motor 1" "C13_Motor 2" "C13_Motor 3" "C13_Motor 4" "C13_Motor 5" "C13_Motor 6" "C13_Motor 7" "C13_Motor 8" "C13_Motor 9" "C13_Motor 10" "C13_Motor 11" C14_0 "C14_Motor 1" "C14_Motor 2" "C14_Motor 3" "C14_Motor 4" "C14_Motor 5" "C14_Motor 6" "C14_Motor 7" "C14_Motor 8" "C14_Motor 9" "C14_Motor 10" "C14_Motor 11": library part "Capacitor (non-polarized)", "Capacitor"
C10 C10_0 "C10_Motor 2" "C10_Motor 3" "C10_Motor 4" "C10_Motor 5" "C10_Motor 6" "C10_Motor 7" "C10_Motor 8" "C10_Motor 9" "C10_Motor 10" "C10_Motor 11": library part "Capacitor (polarized)", "Capacitor (polarized)"
D1 "D1_Motor 1" "D1_Motor 2" "D1_Motor 3" "D1_Motor 4" "D1_Motor 5" "D1_Motor 6" "D1_Motor 7" "D1_Motor 8" "D1_Motor 9" "D1_Motor 10" "D1_Motor 11" D2 "D2_Motor 1" "D2_Motor 2" "D2_Motor 3" "D2_Motor 4" "D2_Motor 5" "D2_Motor 6" "D2_Motor 7" "D2_Motor 8" "D2_Motor 9" "D2_Motor 10" "D2_Motor 11": library part "D Schottky", "Schottky Diode"
JTAG1: library part "Header 3X2", "Header, 3-Pin, Dual row"
LED1 LED2 LED2 "LED2_Motor 1" "LED2_Motor 2" "LED2_Motor 3" "LED2_Motor 4" "LED2_Motor 5" "LED2_Motor 6" "LED2_Motor 7" "LED2_Motor 8" "LED2_Motor 9" "LED2_Motor 10" "LED2_Motor 11": library part LED, "Standard LED"
R1 R3 "R3_Motor 1" "R3_Motor 2" "R3_Motor 3" "R3_Motor 4" "R3_Motor 5" "R3_Motor 6" "R3_Motor 7" "R3_Motor 8" "R3_Motor 9" "R3_Motor 10" "R3_Motor 11" R4 R5 R6 R7 R8 R9 R10 R11 R12 R13 R14 R15 R16 R17 R18 R19 R20 R21 R22 R23 R24 R25 R26 R27 R28 R29 R30 R31 R32 R33 R34 R35 R36 R37 R38 R39 R40 R41 R42 R43 R44 R45 R46 R47 R48 R49 R50 R51 R52 R53 R54 R55 R56 R57: library part Resistor, "Resistor"
U1 U7 U8: "Micropower, Quad, Single Supply, Precision Operational Amplifier"
U2 U3: library part SN74HCT540DW, "Octal Buffer and Line Driver with 3-State Outputs"
W2: library part Jumper, "Jumper Wire"
Y1: library part ECS-120-32-1, "Crystal Oscillator"

## Free pads (board coordinates)
  rect 82.68x25.59 smd: 1(2077.52,6285) 1(2077.56,5175) 1(2079.21,1925) 1(2087.52,3025) 1(3757.32,5175) 1(3759.84,1925) 1(3759.84,6285) 1(3762.17,3025) 1(5437.32,1925) 1(5437.52,3025) 1(5439.69,5180) 1(5439.84,6285) 2(2077.52,6335) 2(2077.56,5225) 2(2079.21,1975) 2(2087.52,3075) 2(3757.32,5225) 2(3759.84,1975) 2(3759.84,6335) 2(3762.17,3075) 2(5437.32,1975) 2(5437.52,3075) 2(5439.69,5230) 2(5439.84,6335) 3(2077.52,6385) 3(2077.56,5275) 3(2079.21,2025) 3(2087.52,3125) 3(3757.32,5275) 3(3759.84,2025) 3(3759.84,6385) 3(3762.17,3125) 3(5437.32,2025) 3(5437.52,3125) 3(5439.69,5280) 3(5439.84,6385) 4(2077.52,6435) 4(2077.56,5325) 4(2079.21,2075) 4(2087.52,3175) 4(3757.32,5325) 4(3759.84,2075) 4(3759.84,6435) 4(3762.17,3175) 4(5437.32,2075) 4(5437.52,3175) 4(5439.69,5330) 4(5439.84,6435) 5(2077.52,6485) 5(2077.56,5375) 5(2079.21,2125) 5(2087.52,3225) 5(3757.32,5375) 5(3759.84,2125) 5(3759.84,6485) 5(3762.17,3225) 5(5437.32,2125) 5(5437.52,3225) 5(5439.69,5380) 5(5439.84,6485) 6(2077.52,6535) 6(2077.56,5425) 6(2079.21,2175) 6(2087.52,3275) 6(3757.32,5425) 6(3759.84,2175) 6(3759.84,6535) 6(3762.17,3275) 6(5437.32,2175) 6(5437.52,3275) 6(5439.69,5430) 6(5439.84,6535) 7(2077.52,6585) 7(2077.56,5475) 7(2079.21,2225) 7(2087.52,3325) 7(3757.32,5475) 7(3759.84,2225) 7(3759.84,6585) 7(3762.17,3325) 7(5437.32,2225) 7(5437.52,3325) 7(5439.69,5480) 7(5439.84,6585) 8(2077.52,6635) 8(2077.56,5525) 8(2079.21,2275) 8(2087.52,3375) 8(3757.32,5525) 8(3759.84,2275) 8(3759.84,6635) 8(3762.17,3375) 8(5437.32,2275) 8(5437.52,3375) 8(5439.69,5530) 8(5439.84,6635) 9(2077.52,6685) 9(2077.56,5575) 9(2079.21,2325) 9(2087.52,3425) 9(3757.32,5575) 9(3759.84,2325) 9(3759.84,6685) 9(3762.17,3425) 9(5437.32,2325) 9(5437.52,3425) 9(5439.69,5580) 9(5439.84,6685) 10(2077.52,6735) 10(2077.56,5625) 10(2079.21,2375) 10(2087.52,3475) 10(3757.32,5625) 10(3759.84,2375) 10(3759.84,6735) 10(3762.17,3475) 10(5437.32,2375) 10(5437.52,3475) 10(5439.69,5630) 10(5439.84,6735) 11(1557.83,6735) 11(1557.87,5625) 11(1559.53,2375) 11(1567.83,3475) 11(3237.64,5625) 11(3240.16,2375) 11(3240.16,6735) 11(3242.48,3475) 11(4917.64,2375) 11(4917.83,3475) 11(4920,5630) 11(4920.16,6735) 12(1557.83,6685) 12(1557.87,5575) 12(1559.53,2325) 12(1567.83,3425) 12(3237.64,5575) 12(3240.16,2325) 12(3240.16,6685) 12(3242.48,3425) 12(4917.64,2325) 12(4917.83,3425) 12(4920,5580) 12(4920.16,6685) 13(1557.83,6635) 13(1557.87,5525) 13(1559.53,2275) 13(1567.83,3375) 13(3237.64,5525) 13(3240.16,2275) 13(3240.16,6635) 13(3242.48,3375) 13(4917.64,2275) 13(4917.83,3375) 13(4920,5530) 13(4920.16,6635) 14(1557.83,6585) 14(1557.87,5475) 14(1559.53,2225) 14(1567.83,3325) 14(3237.64,5475) 14(3240.16,2225) 14(3240.16,6585) 14(3242.48,3325) 14(4917.64,2225) 14(4917.83,3325) 14(4920,5480) 14(4920.16,6585) 15(1557.83,6535) 15(1557.87,5425) 15(1559.53,2175) 15(1567.83,3275) 15(3237.64,5425) 15(3240.16,2175) 15(3240.16,6535) 15(3242.48,3275) 15(4917.64,2175) 15(4917.83,3275) 15(4920,5430) 15(4920.16,6535) 16(1557.83,6485) 16(1557.87,5375) 16(1559.53,2125) 16(1567.83,3225) 16(3237.64,5375) 16(3240.16,2125) 16(3240.16,6485) 16(3242.48,3225) 16(4917.64,2125) 16(4917.83,3225) 16(4920,5380) 16(4920.16,6485) 17(1557.83,6435) 17(1557.87,5325) 17(1559.53,2075) 17(1567.83,3175) 17(3237.64,5325) 17(3240.16,2075) 17(3240.16,6435) 17(3242.48,3175) 17(4917.64,2075) 17(4917.83,3175) 17(4920,5330) 17(4920.16,6435) 18(1557.83,6385) 18(1557.87,5275) 18(1559.53,2025) 18(1567.83,3125) 18(3237.64,5275) 18(3240.16,2025) 18(3240.16,6385) 18(3242.48,3125) 18(4917.64,2025) 18(4917.83,3125) 18(4920,5280) 18(4920.16,6385) 19(1557.83,6335) 19(1557.87,5225) 19(1559.53,1975) 19(1567.83,3075) 19(3237.64,5225) 19(3240.16,1975) 19(3240.16,6335) 19(3242.48,3075) 19(4917.64,1975) 19(4917.83,3075) 19(4920,5230) 19(4920.16,6335) 20(1557.83,6285) 20(1557.87,5175) 20(1559.53,1925) 20(1567.83,3025) 20(3237.64,5175) 20(3240.16,1925) 20(3240.16,6285) 20(3242.48,3025) 20(4917.64,1925) 20(4917.83,3025) 20(4920,5180) 20(4920.16,6285)
  rect 295.28x511.81 smd: 21(1817.68,6510) 21(1817.72,5400) 21(1819.37,2150) 21(1827.68,3250) 21(3497.48,5400) 21(3500,2150) 21(3500,6510) 21(3502.32,3250) 21(5177.48,2150) 21(5177.68,3250) 21(5179.84,5405) 21(5180,6510)

## Via types
v1: diameter 50, hole 35, Top Layer to Bottom Layer, 336 vias
v2: diameter 20, hole 10, Top Layer to Bottom Layer, 183 vias
v3: diameter 30, hole 20, Top Layer to Bottom Layer, 137 vias
v4: diameter 50, hole 40, Top Layer to Bottom Layer, 87 vias
v5: diameter 25, hole 10, Top Layer to Bottom Layer, 1 vias

## Nets (pads, with @x,y where several pads share a name; then routed paths per layer and width w, separated by ;. In a path a pad name is that pad's centre, name@x,y a point inside that pad or via, vN(x,y) a via of type N, cw(c..) or ccw(c..) an arc to the next point about the centre after c; other vN are vias at no path point)
3v3: C7.1 U6.17 | length 225.2
  Top Layer w10: U6.17@2471.06,4458.24 2444.93,4458.24 2431.46,4471.71 2431.46,4597.46 2446,4612 C7.1@2479.68,4612
+5V: 10k.1 "C11_Motor 12.1" *.20 C1.1 C2.1 C3.1 C9.1 R6.2 R7.2 U1.4 U2.20 U3.20 U5.10 U5.31 U5.61 U5.80 U5.100 U6.4 U6.20 U7.4 U8.4 | length 16256.8
  Top Layer w10: R6.2@2120,4523.08 2169.41,4473.67 2169.41,4413.6 ; v2(2391,4272) 2352.36,4272 2344.48,4279.88 2224.39,4279.88 2169.41,4334.86 2169.41,4413.6 ; 2414.09,4746 2402.09,4734 2366,4734 ; C9.1@2416.68,4859 2366,4808.32 2366,4734 ; U6.20@2471.06,4381.46 2466.38,4386.15 2440.24,4386.15 2362.32,4464.07 R7.2@2362.32,4523.08 ; v2(2657,4258) 2661.49,4253.51 U6.4@2728.94,4253.51 ; v3(2940,3870) 3184.72,3870 3349.41,4034.69 3349.41,4039.41 3400,4090 ; C1.1@3085,4707.68 C2.1@3165,4707.68 C3.1@3245,4707.68 3245,4685 3292,4638 3336,4638 3360,4614 U5.100@3360,4576.81 3358.78,4576.81 3358.78,4491.22 3398.11,4451.89 3398.11,4400 ; U5.10@3298.98,4338.62 3366.73,4338.62 ; U5.31@3458.43,3982.32 3458.43,4041.57 ; U5.80@3753.7,4576.81 3753.7,4491.98 3707.72,4446 3656,4446 3610,4400 3398.11,4400 ; U5.61@3893.46,4240.2 3819.8,4240.2 3815,4245 3815,4360.36 3800.36,4375 3779.64,4375 3750,4345.36 3750,4310 3735,4295 3735,4084.95 3720.36,4070.3 3699.64,4070.3 3676.8,4093.15 3510,4093.15 3458.43,4041.57 ; U3.20@5109.13,4735 5132.32,4711.81 5169.41,4711.81 5221.22,4660 v2(5290,4660) ; 2169.41,4413.6 2178.2,4404.81 2311.8,4404.81 2320.59,4413.6 2320.59,4481.35 R7.2@2362.32,4523.08 ; R7.2@2362.32,4523.08 2362.32,4730.32 2366,4734 ; 3366.73,4338.62 3400,4305.36 3400,4090 ; 3366.73,4338.62 3398.11,4370 3398.11,4400 ; 3400,4090 3415.36,4090 3458.43,4046.93 3458.43,4041.57
  Top Layer w25: U2.20@1350.87,4175 1469.42,4056.45 1855,4056.45 v3(1860,4061.45) ; v2(3004,1353) 3044,1313 *.20@3044,1160 ; v2(3004,1518) 3712,1518 4015,1821 4263,1821 4318,1876 4318,3402 4510,3594 v3(4510,3720) ; v3(4510,3940) 4584.93,3940 4670,4025.07 ; v3(4880,4222.5) 4870,4232.5 4836.54,4232.5 4767.5,4163.46 4767.5,4122.57 4670,4025.07 ; v3(5130,4050) 5020,4050 4995.07,4025.07 4670,4025.07
  Bottom Layer w10: v2(1530,4060) 1530,4235.51 1556.3,4261.81 1577.68,4261.81 U1.4@1600.87,4285 ; v2(2391,4272) 2643,4272 v2(2657,4258) 2681,4258 10k.1@2726,4213 ; v3(5130,4050) 5155,4075 5510.36,4075 5525,4089.64 5525,4335 5290,4570 v2(5290,4660)
  Bottom Layer w25: v3(1860,4061.45) 2096.45,4061.45 2307.5,4272.5 2387,4272.5 2392.5,4267 2392.5,4228.54 2458.54,4162.5 2503.46,4162.5 2722.5,3943.46 2722.5,3916.54 2712.19,3906.22 2712.19,3841.72 2744.39,3809.52 ; v3(2940,3870) 2879.52,3809.52 2744.39,3809.52 ; v2(3004,1353) v2(3004,1518) 2750,1772 2750,3803.91 2744.39,3809.52 ; U7.4@4321.73,4240 4370,4240 4457.5,4152.5 4457.5,4116.54 4510,4064.04 v3(4510,3940) v3(4510,3720) ; v3(4880,4222.5) 4922.5,4265 U8.4@4960.87,4265
+24V_0: C10_0.P pad.4@2079.21,2075 pad.5@2079.21,2125 pad.16@1559.53,2125 R58.3 | length 2108.7
  Top Layer w25: pad.16@1559.53,2125 1574.23,2110.3 1610.19,2110.3 1640,2080.48 v4(1640,1850) 1640,1836.85 1726.85,1750 1726.48,1749.63 C10_0.P@1726.48,1675 ; v4@2010,2410 2010,2100 ; pad.4@2079.21,2075 2035,2075 2010,2100 ; pad.5@2079.21,2125 2035,2125 2010,2100
  Bottom Layer w50: v4(1640,1850) 1640,2395.67 1680.55,2436.22 1941.81,2436.22 1950,2444.41 ; R58.3@1950,2593.31 1950,2444.41 ; v4@2010,2410 1984.41,2410 1950,2444.41
  other v4: 2010,2420
+24V_1: C10.P pad.4@3759.84,2075 pad.5@3759.84,2125 pad.16@3240.16,2125 R59.3 | length 2069
  Top Layer w25: v4(3240,2430) 3259.7,2410.3 3290.82,2410.3 3320,2381.11 3320,2100 ; pad.16@3240.16,2125 3295,2125 3320,2100 ; C10.P@3407.48,1675 3407.48,1750 3320,1837.48 3320,2100 ; v4(3680,2430) 3680,2100 ; pad.4@3759.84,2075 3705,2075 3680,2100 ; pad.5@3759.84,2125 3705,2125 3680,2100
  Bottom Layer w50: v4(3240,2430) 3354.96,2430 3361.18,2436.22 3638.82,2436.22 ; 3668.11,2406.93 3638.82,2436.22 ; R59.3@3669.21,2606.65 3669.21,2466.61 3638.82,2436.22
+24V_2: "C10_Motor 2.P" pad.4@5437.32,2075 pad.5@5437.32,2125 pad.16@4917.64,2125 R60.3 | length 2053.4
  Top Layer w25: pad.16@4917.64,2125 4975,2125 5000,2100 ; v4(4990,2440) 5000,2430 5000,2100 ; 5084.48,1678 5084.48,1749.52 5084.96,1750 5000,1834.96 5000,2100 ; v4(5310,2500) 5360,2450 5360,2100 ; pad.4@5437.32,2075 5385,2075 5360,2100 ; pad.5@5437.32,2125 5385,2125 5360,2100
  Bottom Layer w50: v4(4990,2440) 5066.22,2440 5070,2436.22 ; 5038.66,2436.22 5070,2436.22 ; R60.3@5229.21,2576.65 5345.59,2460.28 5321.54,2436.22 5070,2436.22
+24V_3: "C10_Motor 3.P" pad.4@2087.52,3175 pad.5@2087.52,3225 pad.16@1567.83,3225 R61.3 | length 2189.1
  Top Layer w25: pad.16@1567.83,3225 1615,3225 1640,3200 v4(1640,2945.16) 1735.16,2850 1735.16,2788 ; v4(2010,3540) 2010,3200 ; pad.4@2087.52,3175 2035,3175 2010,3200 ; pad.5@2087.52,3225 2035,3225 2010,3200
  Bottom Layer w50: v4(1640,2945.16) 1650,2955.16 1650,3497.36 1688.86,3536.22 1856.22,3536.22 1899.21,3579.21 R61.3@1899.21,3686.65 2010,3575.87 v4(2010,3540)
+24V_4: "C10_Motor 4.P" pad.4@3762.17,3175 pad.5@3762.17,3225 pad.16@3242.48,3225 R62.3 | length 2164.2
  Top Layer w25: pad.16@3242.48,3225 3295,3225 3320,3200 v4(3320,2960) 3320,2939.8 3409.8,2850 3409.8,2788 ; v4(3680,3570) 3680,3200 ; pad.4@3762.17,3175 3705,3175 3680,3200 ; pad.5@3762.17,3225 3705,3225 3680,3200
  Bottom Layer w50: v4(3320,2960) 3320,3200 3334.21,3214.21 3334.21,3506.93 3363.5,3536.22 3431.23,3536.22 3549.21,3654.2 R62.3@3549.21,3706.65 3680,3575.87 v4(3680,3570)
+24V_5: "C10_Motor 5.P" pad.4@5437.52,3175 pad.5@5437.52,3225 pad.16@4917.83,3225 R70.3 | length 2079.6
  Top Layer w25: pad.16@4917.83,3225 4975,3225 5000,3200 ; v4(4940,3540) 4973.59,3506.41 5000,3480 5000,3200 ; 5085.48,2788 5085.48,2849.68 5000,2935.16 5000,3200 ; v4(5360,3550) 5360,3200 ; pad.4@5437.52,3175 5385,3175 5360,3200 ; pad.5@5437.52,3225 5385,3225 5360,3200
  Bottom Layer w50: v4(4940,3540) 5010,3610 5112.64,3610 5120.31,3617.68 5242.69,3617.68 5263.19,3638.18 5263.19,3690.63 R70.3@5289.21,3716.65 5360,3645.87 v4(5360,3550)
+24V_6: "C10_Motor 6.P" pad.4@2077.56,5325 pad.5@2077.56,5375 pad.16@1557.87,5375 R63.3 | length 1777.8
  Top Layer w25: pad.16@1557.87,5375 1615,5375 1640,5350 1640,5110 ; 1724.48,4942 1724.48,4999.28 1725.2,5000 1640,5085.2 1640,5110 ; v4(2000,5100) 1990,5110 1640,5110 ; pad.4@2077.56,5325 2025,5325 2000.35,5349.65 2000,5350 2025,5375 pad.5@2077.56,5375
  Top Layer w50: v4(2000,5100) 2000.35,5100.35 2000.35,5349.65 2000.35,5350
  Bottom Layer w50: R63.3@1859.21,4706.65 2000,4847.44 v4(2000,5100)